# EAGLE board hs-64-spi - panel (EAGLE 9.5.1), part 1 of 4
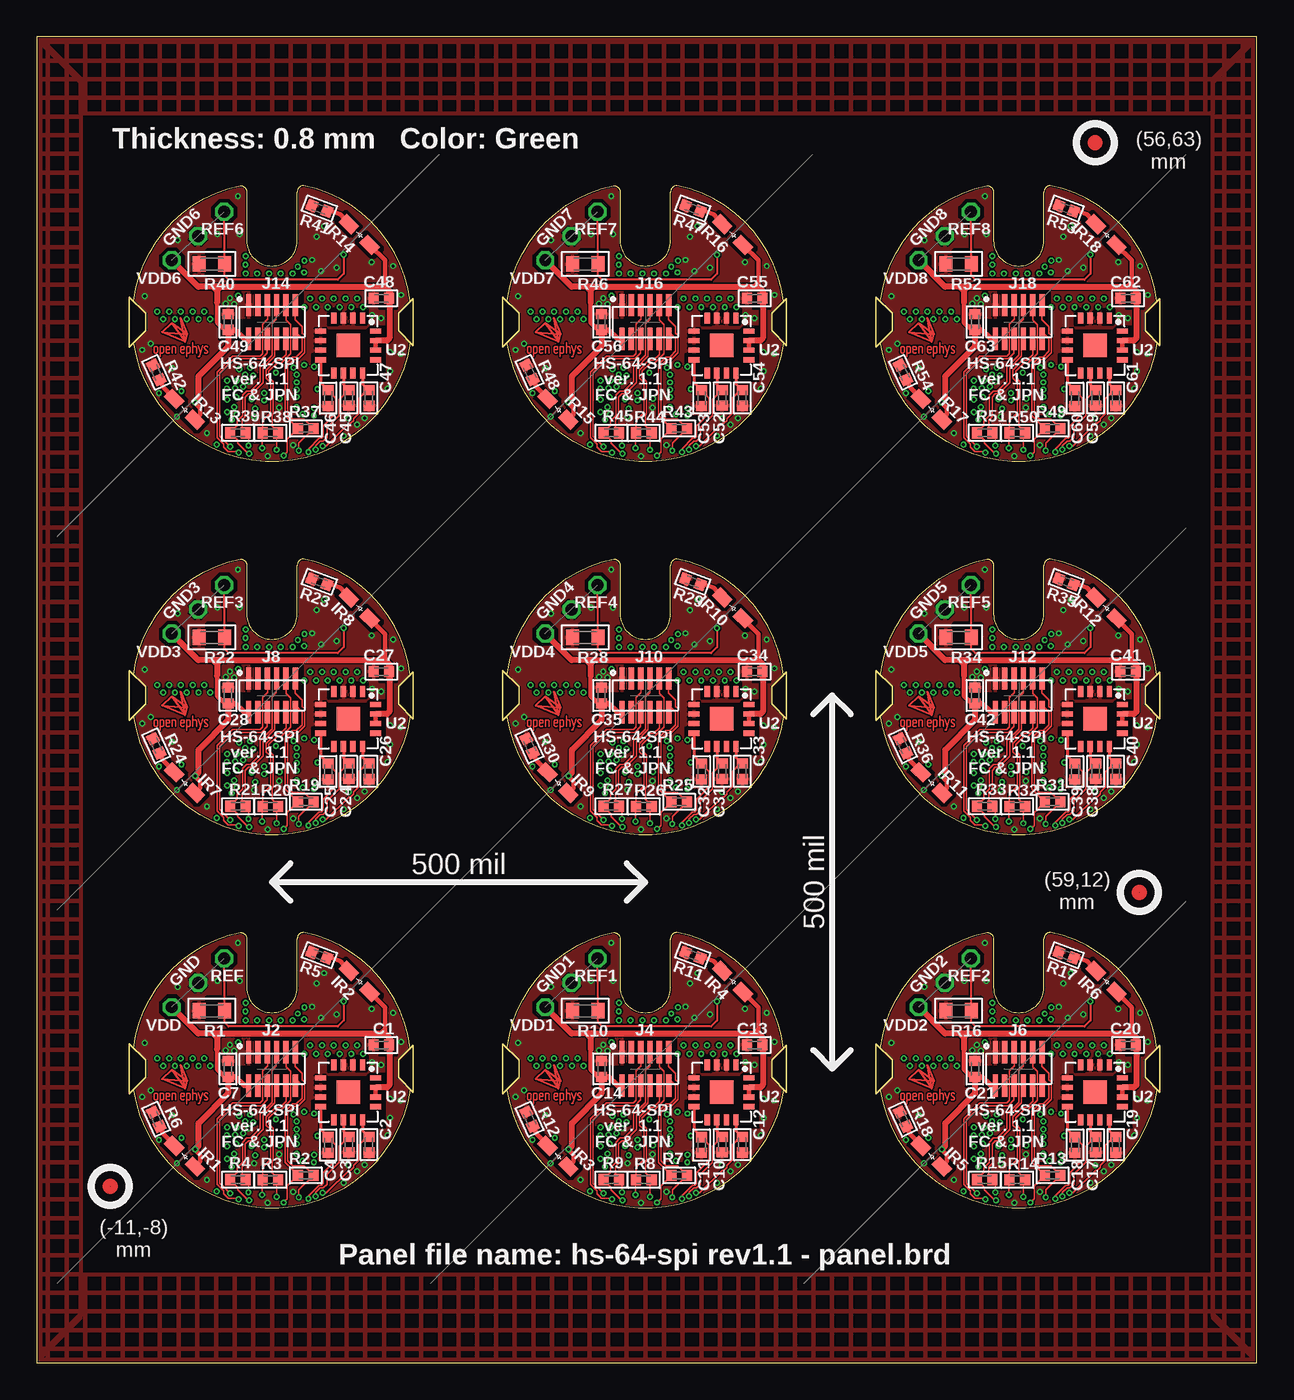
[diagram p0: board, top side]
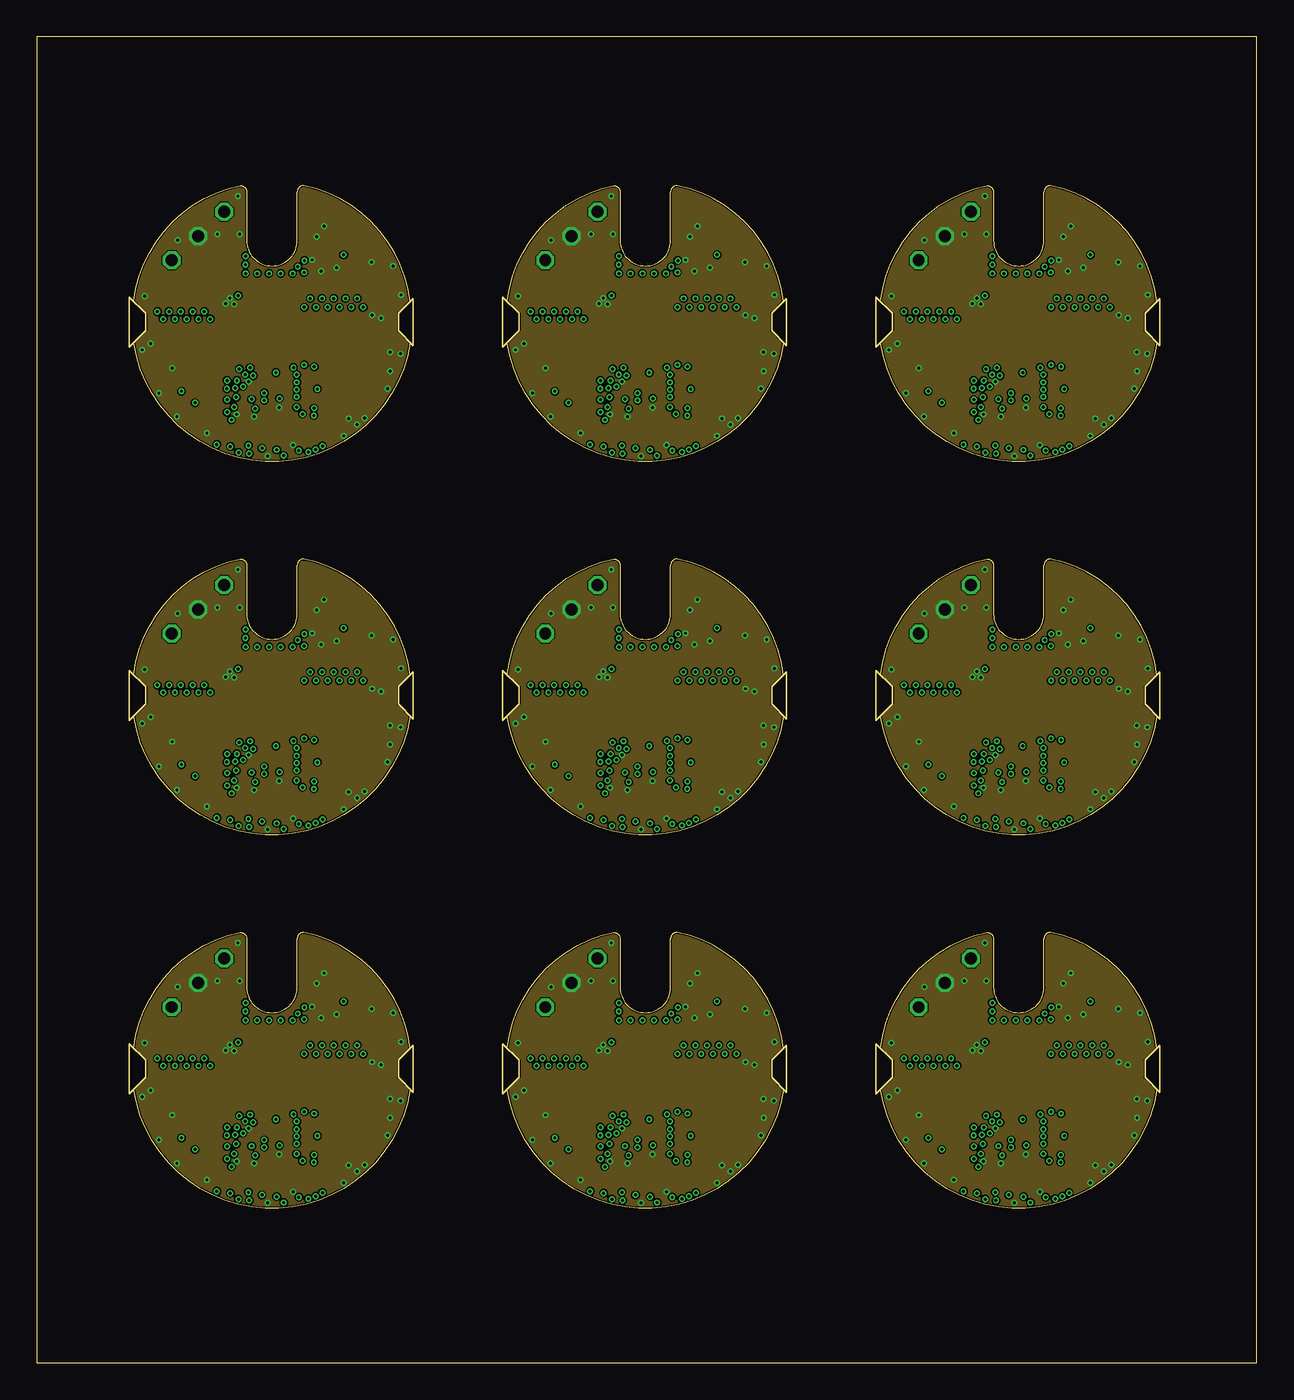
[diagram p1: board, inner layer PWR]
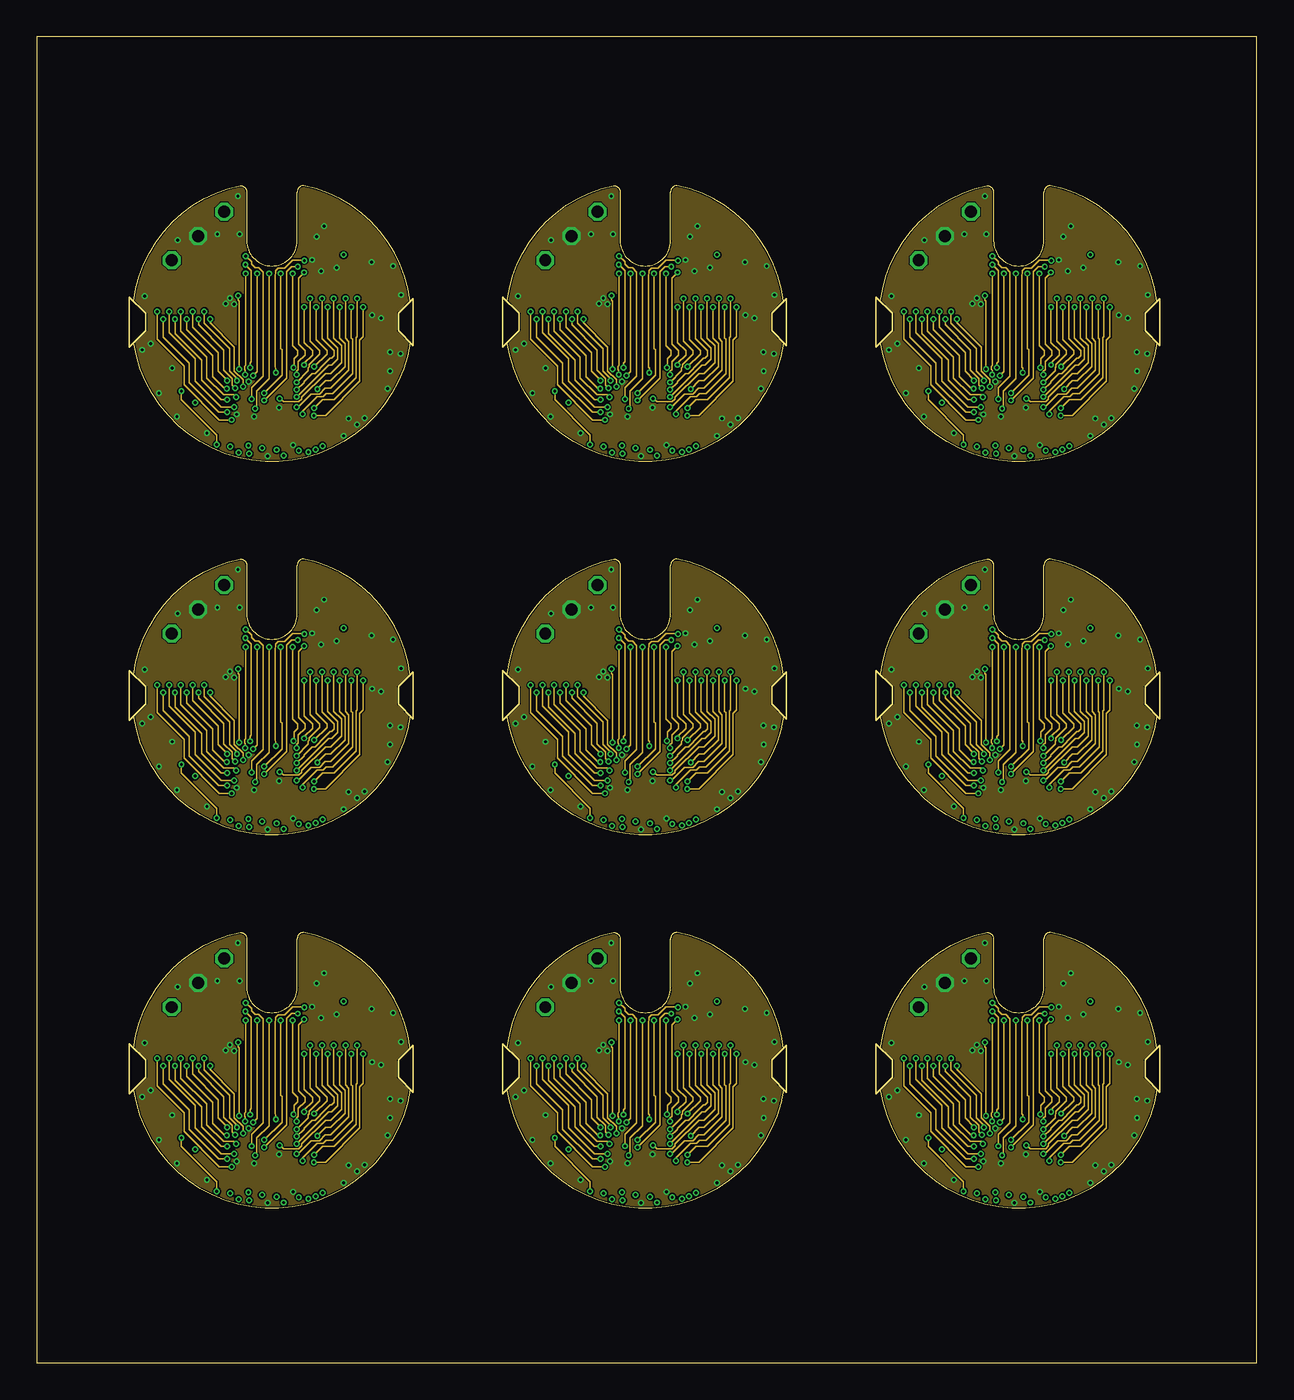
[diagram p2: board, inner layer GND]
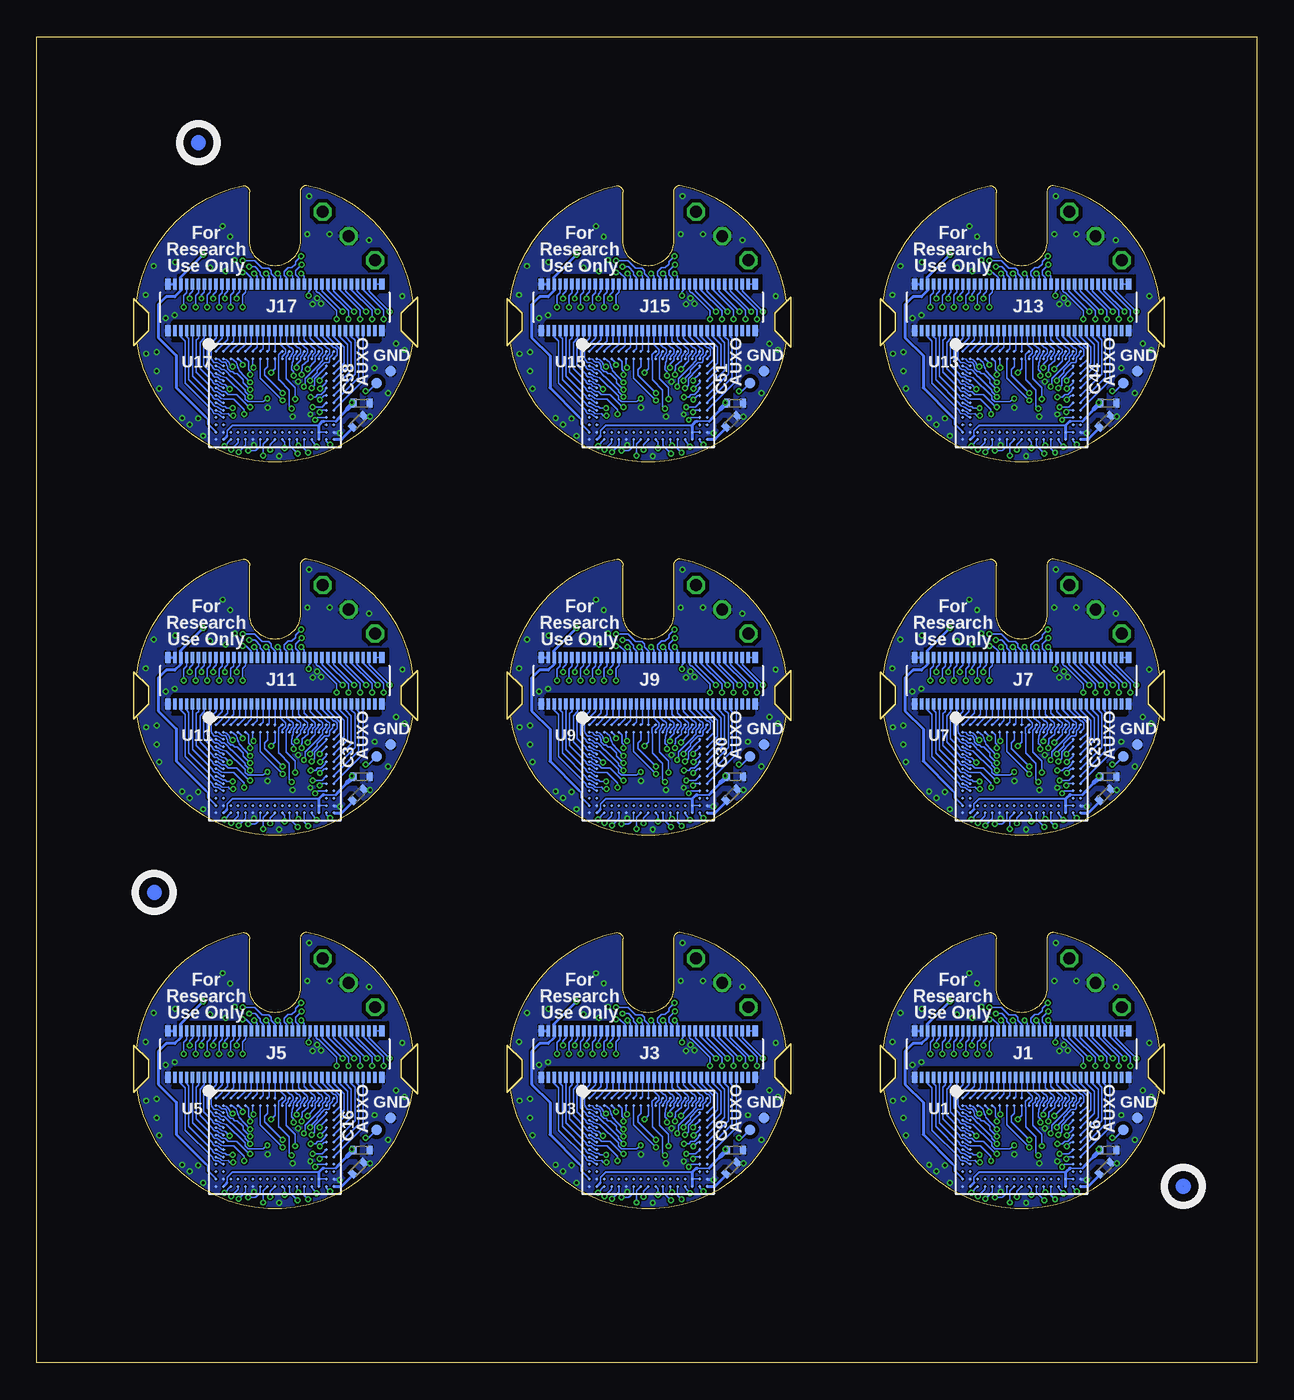
[diagram p3: board, bottom side, seen from below]

Size 83 x 90.2 mm. Coordinates in mm from the lower left corner, seen from the top.
Outline: 0,0 83,0 83,90.2 0,90.2 0,0
Outline: 6.6,21.4 7.4,20.6 7.4,19.4 6.6,18.6 arc163 25.4,18.6 24.6,19.4 24.6,20.6 25.4,21.4 arc72 18.16,29.27 arc90 17.71,28.83 17.71,25.52 arc-90 16,23.81 arc-90 14.29,25.52 14.29,28.83 arc90 13.84,29.27 arc72 6.6,21.4
Outline: 32,21.4 32.8,20.6 32.8,19.4 32,18.6 arc163 50.8,18.6 50,19.4 50,20.6 50.8,21.4 arc72 43.56,29.27 arc90 43.11,28.83 43.11,25.52 arc-90 41.4,23.81 arc-90 39.69,25.52 39.69,28.83 arc90 39.24,29.27 arc72 32,21.4
Outline: 57.4,21.4 58.2,20.6 58.2,19.4 57.4,18.6 arc163 76.2,18.6 75.4,19.4 75.4,20.6 76.2,21.4 arc72 68.96,29.27 arc90 68.51,28.83 68.51,25.52 arc-90 66.8,23.81 arc-90 65.09,25.52 65.09,28.83 arc90 64.64,29.27 arc72 57.4,21.4
Outline: 6.6,46.8 7.4,46 7.4,44.8 6.6,44 arc163 25.4,44 24.6,44.8 24.6,46 25.4,46.8 arc72 18.16,54.67 arc90 17.71,54.23 17.71,50.92 arc-90 16,49.21 arc-90 14.29,50.92 14.29,54.23 arc90 13.84,54.67 arc72 6.6,46.8
Outline: 32,46.8 32.8,46 32.8,44.8 32,44 arc163 50.8,44 50,44.8 50,46 50.8,46.8 arc72 43.56,54.67 arc90 43.11,54.23 43.11,50.92 arc-90 41.4,49.21 arc-90 39.69,50.92 39.69,54.23 arc90 39.24,54.67 arc72 32,46.8
Outline: 57.4,46.8 58.2,46 58.2,44.8 57.4,44 arc163 76.2,44 75.4,44.8 75.4,46 76.2,46.8 arc72 68.96,54.67 arc90 68.51,54.23 68.51,50.92 arc-90 66.8,49.21 arc-90 65.09,50.92 65.09,54.23 arc90 64.64,54.67 arc72 57.4,46.8
Outline: 6.6,72.2 7.4,71.4 7.4,70.2 6.6,69.4 arc163 25.4,69.4 24.6,70.2 24.6,71.4 25.4,72.2 arc72 18.16,80.07 arc90 17.71,79.63 17.71,76.33 arc-90 16,74.61 arc-90 14.29,76.33 14.29,79.63 arc90 13.84,80.07 arc72 6.6,72.2
Outline: 32,72.2 32.8,71.4 32.8,70.2 32,69.4 arc163 50.8,69.4 50,70.2 50,71.4 50.8,72.2 arc72 43.56,80.07 arc90 43.11,79.63 43.11,76.33 arc-90 41.4,74.61 arc-90 39.69,76.33 39.69,79.63 arc90 39.24,80.07 arc72 32,72.2
Outline: 57.4,72.2 58.2,71.4 58.2,70.2 57.4,69.4 arc163 76.2,69.4 75.4,70.2 75.4,71.4 76.2,72.2 arc72 68.96,80.07 arc90 68.51,79.63 68.51,76.33 arc-90 66.8,74.61 arc-90 65.09,76.33 65.09,79.63 arc90 64.64,80.07 arc72 57.4,72.2
Copper layers (1*2+3*16): Top 0.035mm / dielectric 0.2mm / PWR 0.0175mm / dielectric 0.3mm / GND 0.035mm / dielectric 0.2mm / Bottom 0.035mm
Design rules "seeed-studio-4-layer *": minimum track width 0.09mm, minimum drill 0.2mm, track to track 0.09mm, track to pad 0.09mm, pad to pad 0.09mm, via to via 0.09mm, smd to smd 0mil, copper to edge 0.1mm, drill to drill 10mil, minimum pad ring 6mil, minimum via ring 4mil, stop-mask expansion 1mil, vias tented up to drill 100mil, thermal gap 0.1mm
Net classes: 1 thick: width 0.102 mm; 2 diff: width 0.076 mm, drill 0.1 mm, clearance 0.051 mm
tKeepout: area 6.5,17.1 to 8,22.9; area 6.5,17.1 to 8,22.9; area 24,17.1 to 25.5,22.9; area 24,17.1 to 25.5,22.9; area 31.9,17.1 to 33.4,22.9; area 31.9,17.1 to 33.4,22.9; area 49.4,17.1 to 50.9,22.9; area 49.4,17.1 to 50.9,22.9; area 57.3,17.1 to 58.8,22.9; area 57.3,17.1 to 58.8,22.9; area 74.8,17.1 to 76.3,22.9; area 74.8,17.1 to 76.3,22.9; area 6.5,42.5 to 8,48.3; area 6.5,42.5 to 8,48.3; area 24,42.5 to 25.5,48.3; area 24,42.5 to 25.5,48.3; area 31.9,42.5 to 33.4,48.3; area 31.9,42.5 to 33.4,48.3; area 49.4,42.5 to 50.9,48.3; area 49.4,42.5 to 50.9,48.3; area 57.3,42.5 to 58.8,48.3; area 57.3,42.5 to 58.8,48.3; area 74.8,42.5 to 76.3,48.3; area 74.8,42.5 to 76.3,48.3; area 6.5,67.9 to 8,73.7; area 6.5,67.9 to 8,73.7; area 24,67.9 to 25.5,73.7; area 24,67.9 to 25.5,73.7; area 31.9,67.9 to 33.4,73.7; area 31.9,67.9 to 33.4,73.7; area 49.4,67.9 to 50.9,73.7; area 49.4,67.9 to 50.9,73.7; area 57.3,67.9 to 58.8,73.7; area 57.3,67.9 to 58.8,73.7; area 74.8,67.9 to 76.3,73.7; area 74.8,67.9 to 76.3,73.7
tRestrict: 1233 lines
bRestrict: area 8.5,15.3 to 9.6,16.4; area 33.9,15.3 to 35,16.4; area 59.3,15.3 to 60.4,16.4; area 8.5,40.7 to 9.6,41.8; area 33.9,40.7 to 35,41.8; area 59.3,40.7 to 60.4,41.8; area 8.5,66.1 to 9.6,67.2; area 33.9,66.1 to 35,67.2; area 59.3,66.1 to 60.4,67.2; 369 lines
Milling: 72 lines

## Footprints (pad centres in the part's own frame; a part is rotated, then mirrored left to right if it is on the bottom)
0402 = smd 0.686 x 0.762: 1 -0.533,0; 2 0.533,0
0402T = smd 0.4 x 0.6: 1 -0.533,0; 2 0.533,0
TESTPOINT_SMALL = drill 0.813 octagon: 1 0,0
LED_HAND = smd 1.2 x 0.8: A -1,0; K 1,0
DF40-70HEAD-LESS-SILK = smd 0.23 x 0.75: 1 -6.8,-1.585; 2 -6.4,-1.585; 3 -6,-1.585; 4 -5.6,-1.585; 5 -5.2,-1.585; 6 -4.8,-1.585; 7 -4.4,-1.585; 8 -4,-1.585; 9 -3.6,-1.585; 10 -3.2,-1.585; 11 -2.8,-1.585; 12 -2.4,-1.585; 13 -2,-1.585; 14 -1.6,-1.585; 15 -1.2,-1.585; 16 -0.8,-1.585; 17 -0.4,-1.585; 18 0,-1.585; 19 0.4,-1.585; 20 0.8,-1.585; 21 1.2,-1.585; 22 1.6,-1.585; 23 2,-1.585; 24 2.4,-1.585; 25 2.8,-1.585; 26 3.2,-1.585; 27 3.6,-1.585; 28 4,-1.585; 29 4.4,-1.585; 30 4.8,-1.585; 31 5.2,-1.585; 32 5.6,-1.585; 33 6,-1.585; 34 6.4,-1.585; 35 6.8,-1.585; 36 6.8,1.585; 37 6.4,1.585; 38 6,1.585; 39 5.6,1.585; 40 5.2,1.585; 41 4.8,1.585; 42 4.4,1.585; 43 4,1.585; 44 3.6,1.585; 45 3.2,1.585; 46 2.8,1.585; 47 2.4,1.585; 48 2,1.585; 49 1.6,1.585; 50 1.2,1.585; 51 0.8,1.585; 52 0.4,1.585; 53 0,1.585; 54 -0.4,1.585; 55 -0.8,1.585; 56 -1.2,1.585; 57 -1.6,1.585; 58 -2,1.585; 59 -2.4,1.585; 60 -2.8,1.585; 61 -3.2,1.585; 62 -3.6,1.585; 63 -4,1.585; 64 -4.4,1.585; 65 -4.8,1.585; 66 -5.2,1.585; 67 -5.6,1.585; 68 -6,1.585; 69 -6.4,1.585; 70 -6.8,1.585 | smd 0.35 x 0.75: M1 -7.275,-1.585; M2 7.275,-1.585; M3 7.275,1.585; M4 -7.275,1.585
A79622-001 = smd 0.36 x 1.524: 1 -1.587,1.143; 2 -1.587,-1.143; 3 -0.953,1.143; 4 -0.953,-1.143; 5 -0.318,1.143; 6 -0.318,-1.143; 7 0.318,1.143; 8 0.318,-1.143; 9 0.953,1.143; 10 0.953,-1.143; 11 1.587,1.143; 12 1.587,-1.143
0603 = smd 0.889 x 1.067: 1 -0.864,0; 2 0.864,0
TP07R = smd 0.7 x 0.7: TP 0,0
BGA104_0.5MM = smd 0.2 x 0.2: A1 -4,3; A2 -3.5,3; A3 -3,3; A4 -2.5,3; A5 -2,3; A6 -1.5,3; A7 -1,3; A8 -0.5,3; A9 0,3; A10 0.5,3; A11 1,3; A12 1.5,3; A13 2,3; A14 2.5,3; A15 3,3; A16 3.5,3; A17 4,3; B1 -4,2.5; B2 -3.5,2.5; B3 -3,2.5; B4 -2.5,2.5; B5 -2,2.5; B6 -1.5,2.5; B7 -1,2.5; B8 -0.5,2.5; B9 0,2.5; B10 0.5,2.5; B11 1,2.5; B12 1.5,2.5; B13 2,2.5; B14 2.5,2.5; B15 3,2.5; B16 3.5,2.5; B17 4,2.5; C1 -4,2; C2 -3.5,2; C16 3.5,2; C17 4,2; D1 -4,1.5; D2 -3.5,1.5; D16 3.5,1.5; D17 4,1.5; E1 -4,1; E2 -3.5,1; E16 3.5,1; E17 4,1; F1 -4,0.5; F2 -3.5,0.5; F16 3.5,0.5; F17 4,0.5; G1 -4,0; G2 -3.5,0; G16 3.5,0; G17 4,0; H1 -4,-0.5; H2 -3.5,-0.5; H16 3.5,-0.5; H17 4,-0.5; J1 -4,-1; J2 -3.5,-1; J16 3.5,-1; J17 4,-1; K1 -4,-1.5; K2 -3.5,-1.5; K16 3.5,-1.5; K17 4,-1.5; L1 -4,-2; L2 -3.5,-2; L16 3.5,-2; L17 4,-2; M1 -4,-2.5; M2 -3.5,-2.5; M3 -3,-2.5; M4 -2.5,-2.5; M5 -2,-2.5; M6 -1.5,-2.5; M7 -1,-2.5; M8 -0.5,-2.5; M9 0,-2.5; M10 0.5,-2.5; M11 1,-2.5; M12 1.5,-2.5; M13 2,-2.5; M14 2.5,-2.5; M15 3,-2.5; M16 3.5,-2.5; M17 4,-2.5; N1 -4,-3; N2 -3.5,-3; N3 -3,-3; N4 -2.5,-3; N5 -2,-3; N6 -1.5,-3; N7 -1,-3; N8 -0.5,-3; N9 0,-3; N10 0.5,-3; N11 1,-3; N12 1.5,-3; N13 2,-3; N14 2.5,-3; N15 3,-3; N16 3.5,-3; N17 4,-3
ADXL335_IDAX = smd 0.75 x 0.35: 1 -1.875,0.975; 2 -1.875,0.325; 3 -1.875,-0.325; 4 -1.875,-0.975; 9 1.875,-0.975; 10 1.875,-0.325; 11 1.875,0.325; 12 1.875,0.975 | smd 0.35 x 0.75: 5 -0.975,-1.875; 6 -0.325,-1.875; 7 0.325,-1.875; 8 0.975,-1.875; 13 0.975,1.875; 14 0.325,1.875; 15 -0.325,1.875; 16 -0.975,1.875 | smd 1.6 x 1.6: CENTER 0,0

## Placement (x,y rotation side)
C1  0.1uF  [0402]  23.44,21.61 180 top
C2  27n  [0402]  22.6,14.83 270 top
C3  27n  [0402]  21.23,14.84 270 top
C4  27n  [0402]  19.82,14.82 270 top
C5  10nF  [0402T]  10.33,13.23 45 bottom
C6  0.1uF  [0402T]  10.1,14.47 180 bottom
C7  1u  [0402]  13.02,19.99 90 top
C8  10nF  [0402T]  35.73,13.23 45 bottom
C9  0.1uF  [0402T]  35.5,14.47 180 bottom
C10  27n  [0402]  46.63,14.84 270 top
C11  27n  [0402]  45.22,14.82 270 top
C12  27n  [0402]  48,14.83 270 top
C13  0.1uF  [0402]  48.84,21.61 180 top
C14  1u  [0402]  38.42,19.99 90 top
C15  10nF  [0402T]  61.13,13.23 45 bottom
C16  0.1uF  [0402T]  60.9,14.47 180 bottom
C17  27n  [0402]  72.03,14.84 270 top
C18  27n  [0402]  70.62,14.82 270 top
C19  27n  [0402]  73.4,14.83 270 top
C20  0.1uF  [0402]  74.24,21.61 180 top
C21  1u  [0402]  63.82,19.99 90 top
C22  10nF  [0402T]  10.33,38.63 45 bottom
C23  0.1uF  [0402T]  10.1,39.87 180 bottom
C24  27n  [0402]  21.23,40.24 270 top
C25  27n  [0402]  19.82,40.22 270 top
C26  27n  [0402]  22.6,40.23 270 top
C27  0.1uF  [0402]  23.44,47.01 180 top
C28  1u  [0402]  13.02,45.39 90 top
C29  10nF  [0402T]  35.73,38.63 45 bottom
C30  0.1uF  [0402T]  35.5,39.87 180 bottom
C31  27n  [0402]  46.63,40.24 270 top
C32  27n  [0402]  45.22,40.22 270 top
C33  27n  [0402]  48,40.23 270 top
C34  0.1uF  [0402]  48.84,47.01 180 top
C35  1u  [0402]  38.42,45.39 90 top
C36  10nF  [0402T]  61.13,38.63 45 bottom
C37  0.1uF  [0402T]  60.9,39.87 180 bottom
C38  27n  [0402]  72.03,40.24 270 top
C39  27n  [0402]  70.62,40.22 270 top
C40  27n  [0402]  73.4,40.23 270 top
C41  0.1uF  [0402]  74.24,47.01 180 top
C42  1u  [0402]  63.82,45.39 90 top
C43  10nF  [0402T]  10.33,64.03 45 bottom
C44  0.1uF  [0402T]  10.1,65.27 180 bottom
C45  27n  [0402]  21.23,65.64 270 top
C46  27n  [0402]  19.82,65.62 270 top
C47  27n  [0402]  22.6,65.63 270 top
C48  0.1uF  [0402]  23.44,72.41 180 top
C49  1u  [0402]  13.02,70.79 90 top
C50  10nF  [0402T]  35.73,64.03 45 bottom
C51  0.1uF  [0402T]  35.5,65.27 180 bottom
C52  27n  [0402]  46.63,65.64 270 top
C53  27n  [0402]  45.22,65.62 270 top
C54  27n  [0402]  48,65.63 270 top
C55  0.1uF  [0402]  48.84,72.41 180 top
C56  1u  [0402]  38.42,70.79 90 top
C57  10nF  [0402T]  61.13,64.03 45 bottom
C58  0.1uF  [0402T]  60.9,65.27 180 bottom
C59  27n  [0402]  72.03,65.64 270 top
C60  27n  [0402]  70.62,65.62 270 top
C61  27n  [0402]  73.4,65.63 270 top
C62  0.1uF  [0402]  74.24,72.41 180 top
C63  1u  [0402]  63.82,70.79 90 top
E$1  [FIDUCIAL]  5,12 0 top
E$2  [FIDUCIAL]  75,32 0 top
E$3  [FIDUCIAL]  72,83 0 top
E$4  [FIDUCIAL]  5,12 0 bottom
E$5  [FIDUCIAL]  75,32 0 bottom
E$6  [FIDUCIAL]  72,83 0 bottom
GND  TESTPOINT_SMALL  [TESTPOINT_SMALL]  10.97,25.84 0 top
GND1  TESTPOINT_SMALL  [TESTPOINT_SMALL]  36.37,25.84 0 top
GND2  TESTPOINT_SMALL  [TESTPOINT_SMALL]  61.77,25.84 0 top
GND3  TESTPOINT_SMALL  [TESTPOINT_SMALL]  10.97,51.24 0 top
GND4  TESTPOINT_SMALL  [TESTPOINT_SMALL]  36.37,51.24 0 top
GND5  TESTPOINT_SMALL  [TESTPOINT_SMALL]  61.77,51.24 0 top
GND6  TESTPOINT_SMALL  [TESTPOINT_SMALL]  10.97,76.64 0 top
GND7  TESTPOINT_SMALL  [TESTPOINT_SMALL]  36.37,76.64 0 top
GND8  TESTPOINT_SMALL  [TESTPOINT_SMALL]  61.77,76.64 0 top
IR1  [LED_HAND]  10.06,14.06 135 top
IR2  [LED_HAND]  21.94,25.94 135 top
IR3  [LED_HAND]  35.46,14.06 135 top
IR4  [LED_HAND]  47.34,25.94 135 top
IR5  [LED_HAND]  60.86,14.06 135 top
IR6  [LED_HAND]  72.74,25.94 135 top
IR7  [LED_HAND]  10.06,39.46 135 top
IR8  [LED_HAND]  21.94,51.34 135 top
IR9  [LED_HAND]  35.46,39.46 135 top
IR10  [LED_HAND]  47.34,51.34 135 top
IR11  [LED_HAND]  60.86,39.46 135 top
IR12  [LED_HAND]  72.74,51.34 135 top
IR13  [LED_HAND]  10.06,64.86 135 top
IR14  [LED_HAND]  21.94,76.74 135 top
IR15  [LED_HAND]  35.46,64.86 135 top
IR16  [LED_HAND]  47.34,76.74 135 top
IR17  [LED_HAND]  60.86,64.86 135 top
IR18  [LED_HAND]  72.74,76.74 135 top
J1  DF40C-70DP-0.4V(51)  [DF40-70HEAD-LESS-SILK]  16,21 0 bottom
J2  A79622-001  [A79622-001]  16,20 0 top
J3  DF40C-70DP-0.4V(51)  [DF40-70HEAD-LESS-SILK]  41.4,21 0 bottom
J4  A79622-001  [A79622-001]  41.4,20 0 top
J5  DF40C-70DP-0.4V(51)  [DF40-70HEAD-LESS-SILK]  66.8,21 0 bottom
J6  A79622-001  [A79622-001]  66.8,20 0 top
J7  DF40C-70DP-0.4V(51)  [DF40-70HEAD-LESS-SILK]  16,46.4 0 bottom
J8  A79622-001  [A79622-001]  16,45.4 0 top
J9  DF40C-70DP-0.4V(51)  [DF40-70HEAD-LESS-SILK]  41.4,46.4 0 bottom
J10  A79622-001  [A79622-001]  41.4,45.4 0 top
J11  DF40C-70DP-0.4V(51)  [DF40-70HEAD-LESS-SILK]  66.8,46.4 0 bottom
J12  A79622-001  [A79622-001]  66.8,45.4 0 top
J13  DF40C-70DP-0.4V(51)  [DF40-70HEAD-LESS-SILK]  16,71.8 0 bottom
J14  A79622-001  [A79622-001]  16,70.8 0 top
J15  DF40C-70DP-0.4V(51)  [DF40-70HEAD-LESS-SILK]  41.4,71.8 0 bottom
J16  A79622-001  [A79622-001]  41.4,70.8 0 top
J17  DF40C-70DP-0.4V(51)  [DF40-70HEAD-LESS-SILK]  66.8,71.8 0 bottom
J18  A79622-001  [A79622-001]  66.8,70.8 0 top
R1  DNP  [0603]  11.92,23.95 0 top
R2  100  [0402]  18.3,12.75 180 top
R3  100  [0402]  15.9,12.45 180 top
R4  100  [0402]  13.68,12.46 0 top
R5  820  [0402]  19.23,27.72 160 top
R6  820  [0402]  8.13,16.57 115 top
R7  100  [0402]  43.7,12.75 180 top
R8  100  [0402]  41.3,12.45 180 top
R9  100  [0402]  39.08,12.46 0 top
R10  DNP  [0603]  37.32,23.95 0 top
R11  820  [0402]  44.63,27.72 160 top
R12  820  [0402]  33.53,16.57 115 top
R13  100  [0402]  69.1,12.75 180 top
R14  100  [0402]  66.7,12.45 180 top
R15  100  [0402]  64.48,12.46 0 top
R16  DNP  [0603]  62.72,23.95 0 top
R17  820  [0402]  70.03,27.72 160 top
R18  820  [0402]  58.93,16.57 115 top
R19  100  [0402]  18.3,38.15 180 top
R20  100  [0402]  15.9,37.85 180 top
R21  100  [0402]  13.68,37.86 0 top
R22  DNP  [0603]  11.92,49.35 0 top
R23  820  [0402]  19.23,53.12 160 top
R24  820  [0402]  8.13,41.97 115 top
R25  100  [0402]  43.7,38.15 180 top
R26  100  [0402]  41.3,37.85 180 top
R27  100  [0402]  39.08,37.86 0 top
R28  DNP  [0603]  37.32,49.35 0 top
R29  820  [0402]  44.63,53.12 160 top
R30  820  [0402]  33.53,41.97 115 top
R31  100  [0402]  69.1,38.15 180 top
R32  100  [0402]  66.7,37.85 180 top
R33  100  [0402]  64.48,37.86 0 top
R34  DNP  [0603]  62.72,49.35 0 top
R35  820  [0402]  70.03,53.12 160 top
R36  820  [0402]  58.93,41.97 115 top
R37  100  [0402]  18.3,63.55 180 top
R38  100  [0402]  15.9,63.25 180 top
R39  100  [0402]  13.68,63.26 0 top
R40  DNP  [0603]  11.92,74.75 0 top
R41  820  [0402]  19.23,78.52 160 top
R42  820  [0402]  8.13,67.37 115 top
R43  100  [0402]  43.7,63.55 180 top
R44  100  [0402]  41.3,63.25 180 top
R45  100  [0402]  39.08,63.26 0 top
R46  DNP  [0603]  37.32,74.75 0 top
R47  820  [0402]  44.63,78.52 160 top
R48  820  [0402]  33.53,67.37 115 top
R49  100  [0402]  69.1,63.55 180 top
R50  100  [0402]  66.7,63.25 180 top
R51  100  [0402]  64.48,63.26 0 top
R52  DNP  [0603]  62.72,74.75 0 top
R53  820  [0402]  70.03,78.52 160 top
R54  820  [0402]  58.93,67.37 115 top
REF  TESTPOINT_SMALL  [TESTPOINT_SMALL]  12.75,27.49 0 top
REF1  TESTPOINT_SMALL  [TESTPOINT_SMALL]  38.15,27.49 0 top
REF2  TESTPOINT_SMALL  [TESTPOINT_SMALL]  63.55,27.49 0 top
REF3  TESTPOINT_SMALL  [TESTPOINT_SMALL]  12.75,52.89 0 top
REF4  TESTPOINT_SMALL  [TESTPOINT_SMALL]  38.15,52.89 0 top
REF5  TESTPOINT_SMALL  [TESTPOINT_SMALL]  63.55,52.89 0 top
REF6  TESTPOINT_SMALL  [TESTPOINT_SMALL]  12.75,78.29 0 top
REF7  TESTPOINT_SMALL  [TESTPOINT_SMALL]  38.15,78.29 0 top
REF8  TESTPOINT_SMALL  [TESTPOINT_SMALL]  63.55,78.29 0 top
TP1  VCC  [TP07R]  8.12,16.64 0 bottom
TP2  VCC  [TP07R]  9.08,15.83 0 bottom
TP3  VCC  [TP07R]  34.48,15.83 0 bottom
TP4  VCC  [TP07R]  33.52,16.64 0 bottom
TP5  VCC  [TP07R]  59.88,15.83 0 bottom
TP6  VCC  [TP07R]  58.92,16.64 0 bottom
TP7  VCC  [TP07R]  9.08,41.23 0 bottom
TP8  VCC  [TP07R]  8.12,42.04 0 bottom
TP9  VCC  [TP07R]  34.48,41.23 0 bottom
TP10  VCC  [TP07R]  33.52,42.04 0 bottom
TP11  VCC  [TP07R]  59.88,41.23 0 bottom
TP12  VCC  [TP07R]  58.92,42.04 0 bottom
TP13  VCC  [TP07R]  9.08,66.63 0 bottom
TP14  VCC  [TP07R]  8.12,67.44 0 bottom
TP15  VCC  [TP07R]  34.48,66.63 0 bottom
TP16  VCC  [TP07R]  33.52,67.44 0 bottom
TP17  VCC  [TP07R]  59.88,66.63 0 bottom
TP18  VCC  [TP07R]  58.92,67.44 0 bottom
U1  RHD2064_BGA  [BGA104_0.5MM]  16,15 0 bottom
U2  ADXL335_IDAX  [ADXL335_IDAX]  21.18,18.4 270 top
U3  RHD2064_BGA  [BGA104_0.5MM]  41.4,15 0 bottom
U4  ADXL335_IDAX  [ADXL335_IDAX]  46.58,18.4 270 top
U5  RHD2064_BGA  [BGA104_0.5MM]  66.8,15 0 bottom
U6  ADXL335_IDAX  [ADXL335_IDAX]  71.98,18.4 270 top
U7  RHD2064_BGA  [BGA104_0.5MM]  16,40.4 0 bottom
U8  ADXL335_IDAX  [ADXL335_IDAX]  21.18,43.8 270 top
U9  RHD2064_BGA  [BGA104_0.5MM]  41.4,40.4 0 bottom
U10  ADXL335_IDAX  [ADXL335_IDAX]  46.58,43.8 270 top
U11  RHD2064_BGA  [BGA104_0.5MM]  66.8,40.4 0 bottom
U12  ADXL335_IDAX  [ADXL335_IDAX]  71.98,43.8 270 top
U13  RHD2064_BGA  [BGA104_0.5MM]  16,65.8 0 bottom
U14  ADXL335_IDAX  [ADXL335_IDAX]  21.18,69.2 270 top
U15  RHD2064_BGA  [BGA104_0.5MM]  41.4,65.8 0 bottom
U16  ADXL335_IDAX  [ADXL335_IDAX]  46.58,69.2 270 top
U17  RHD2064_BGA  [BGA104_0.5MM]  66.8,65.8 0 bottom
U18  ADXL335_IDAX  [ADXL335_IDAX]  71.98,69.2 270 top
VDD  TESTPOINT_SMALL  [TESTPOINT_SMALL]  9.19,24.19 0 top
VDD1  TESTPOINT_SMALL  [TESTPOINT_SMALL]  34.59,24.19 0 top
VDD2  TESTPOINT_SMALL  [TESTPOINT_SMALL]  59.99,24.19 0 top
VDD3  TESTPOINT_SMALL  [TESTPOINT_SMALL]  9.19,49.59 0 top
VDD4  TESTPOINT_SMALL  [TESTPOINT_SMALL]  34.59,49.59 0 top
VDD5  TESTPOINT_SMALL  [TESTPOINT_SMALL]  59.99,49.59 0 top
VDD6  TESTPOINT_SMALL  [TESTPOINT_SMALL]  9.19,74.99 0 top
VDD7  TESTPOINT_SMALL  [TESTPOINT_SMALL]  34.59,74.99 0 top
VDD8  TESTPOINT_SMALL  [TESTPOINT_SMALL]  59.99,74.99 0 top
X  OE-LOGO_3.5X2.5  [OE-LOGO-3.5X2.5]  9.63,18.56 0 top
X1  OE-LOGO_3.5X2.5  [OE-LOGO-3.5X2.5]  35.03,18.56 0 top
X2  OE-LOGO_3.5X2.5  [OE-LOGO-3.5X2.5]  60.43,18.56 0 top
X3  OE-LOGO_3.5X2.5  [OE-LOGO-3.5X2.5]  9.63,43.96 0 top
X4  OE-LOGO_3.5X2.5  [OE-LOGO-3.5X2.5]  35.03,43.96 0 top
X5  OE-LOGO_3.5X2.5  [OE-LOGO-3.5X2.5]  60.43,43.96 0 top
X6  OE-LOGO_3.5X2.5  [OE-LOGO-3.5X2.5]  9.63,69.36 0 top
X7  OE-LOGO_3.5X2.5  [OE-LOGO-3.5X2.5]  35.03,69.36 0 top
X8  OE-LOGO_3.5X2.5  [OE-LOGO-3.5X2.5]  60.43,69.36 0 top

## Library data of the parts
C1-C4 C6 C7 C9-C14 C16-C21 C23-C28 C30-C35 C37-C42 C44-C49 C51-C56 C58-C63 J1 J3 J5 J7 J9 J11 J13 J15 J17 R2-R9 R11-R15 R17-R21 R23-R27 R29-R33 R35-R39 R41-R45 R47-R51 R53 R54 TP1-TP18 U1 U3 U5 U7 U9 U11 U13 U15 U17 X X1-X8 = jonnew
C5 C8 C15 C22 C29 C36 C43 C50 C57 = jonnew; PARTNO: GRM033R71E103KE14D
E$1-E$6 = fiducial
GND GND1-GND8 REF REF1-REF8 VDD VDD1-VDD8 = RHD2000_eval_board
IR1-IR18 = CNP-miscellaneous
J2 J4 J6 J8 J10 J12 J14 J16 J18 U2 U4 U6 U8 U10 U12 U14 U16 U18 = hs-64-spi
R1 R10 R16 R22 R28 R34 R40 R46 R52 = jonnew; DK: PxxxxHTR-ND; MN: Panasonic; MPN: ERJ-3EKFxxxxV

## Nets
+3V3_AN: C1.1 C6.2 C7.1 IR1.A IR2.A J2.2 U1.M15 U1.M16 U1.N2 U1.N15 U2.14 U2.15 VDD.1
+3V3_AN1: C9.2 C13.1 C14.1 IR3.A IR4.A J4.2 U3.M15 U3.M16 U3.N2 U3.N15 U4.14 U4.15 VDD1.1
+3V3_AN2: C16.2 C20.1 C21.1 IR5.A IR6.A J6.2 U5.M15 U5.M16 U5.N2 U5.N15 U6.14 U6.15 VDD2.1
+3V3_AN3: C23.2 C27.1 C28.1 IR7.A IR8.A J8.2 U7.M15 U7.M16 U7.N2 U7.N15 U8.14 U8.15 VDD3.1
+3V3_AN4: C30.2 C34.1 C35.1 IR9.A IR10.A J10.2 U9.M15 U9.M16 U9.N2 U9.N15 U10.14 U10.15 VDD4.1
+3V3_AN5: C37.2 C41.1 C42.1 IR11.A IR12.A J12.2 U11.M15 U11.M16 U11.N2 U11.N15 U12.14 U12.15 VDD5.1
+3V3_AN6: C44.2 C48.1 C49.1 IR13.A IR14.A J14.2 U13.M15 U13.M16 U13.N2 U13.N15 U14.14 U14.15 VDD6.1
+3V3_AN7: C51.2 C55.1 C56.1 IR15.A IR16.A J16.2 U15.M15 U15.M16 U15.N2 U15.N15 U16.14 U16.15 VDD7.1
+3V3_AN8: C58.2 C62.1 C63.1 IR17.A IR18.A J18.2 U17.M15 U17.M16 U17.N2 U17.N15 U18.14 U18.15 VDD8.1
AGND6: C1.2 C2.2 C3.2 C4.2 C5.2 C6.1 C7.2 GND.1 J1.70 J1.M1 J1.M2 J1.M4 J2.1 R1.1 R5.2 R6.2 TP1.TP U1.M2 U1.M17 U1.N1 U1.N6 U2.2 U2.3 U2.5 U2.6 U2.7
AGND7: C8.2 C9.1 C10.2 C11.2 C12.2 C13.2 C14.2 GND1.1 J3.70 J3.M1 J3.M2 J3.M4 J4.1 R10.1 R11.2 R12.2 TP4.TP U3.M2 U3.M17 U3.N1 U3.N6 U4.2 U4.3 U4.5 U4.6 U4.7
AGND8: C15.2 C16.1 C17.2 C18.2 C19.2 C20.2 C21.2 GND2.1 J5.70 J5.M1 J5.M2 J5.M4 J6.1 R16.1 R17.2 R18.2 TP6.TP U5.M2 U5.M17 U5.N1 U5.N6 U6.2 U6.3 U6.5 U6.6 U6.7
AGND9: C22.2 C23.1 C24.2 C25.2 C26.2 C27.2 C28.2 GND3.1 J7.70 J7.M1 J7.M2 J7.M4 J8.1 R22.1 R23.2 R24.2 TP8.TP U7.M2 U7.M17 U7.N1 U7.N6 U8.2 U8.3 U8.5 U8.6 U8.7
AGND10: C29.2 C30.1 C31.2 C32.2 C33.2 C34.2 C35.2 GND4.1 J9.70 J9.M1 J9.M2 J9.M4 J10.1 R28.1 R29.2 R30.2 TP10.TP U9.M2 U9.M17 U9.N1 U9.N6 U10.2 U10.3 U10.5 U10.6 U10.7
AGND11: C36.2 C37.1 C38.2 C39.2 C40.2 C41.2 C42.2 GND5.1 J11.70 J11.M1 J11.M2 J11.M4 J12.1 R34.1 R35.2 R36.2 TP12.TP U11.M2 U11.M17 U11.N1 U11.N6 U12.2 U12.3 U12.5 U12.6 U12.7
AGND12: C43.2 C44.1 C45.2 C46.2 C47.2 C48.2 C49.2 GND6.1 J13.70 J13.M1 J13.M2 J13.M4 J14.1 R40.1 R41.2 R42.2 TP14.TP U13.M2 U13.M17 U13.N1 U13.N6 U14.2 U14.3 U14.5 U14.6 U14.7
AGND13: C50.2 C51.1 C52.2 C53.2 C54.2 C55.2 C56.2 GND7.1 J15.70 J15.M1 J15.M2 J15.M4 J16.1 R46.1 R47.2 R48.2 TP16.TP U15.M2 U15.M17 U15.N1 U15.N6 U16.2 U16.3 U16.5 U16.6 U16.7
AGND14: C57.2 C58.1 C59.2 C60.2 C61.2 C62.2 C63.2 GND8.1 J17.70 J17.M1 J17.M2 J17.M4 J18.1 R52.1 R53.2 R54.2 TP18.TP U17.M2 U17.M17 U17.N1 U17.N6 U18.2 U18.3 U18.5 U18.6 U18.7
E0: J1.2 U1.K2
E1: J1.68 U1.J1
E2: J1.3 U1.J2
E3: J1.67 U1.H1
E4: J1.4 U1.H2
E5: J1.66 U1.G1
E6: J1.5 U1.G2
E7: J1.65 U1.F1
E8: J1.6 U1.F2
E9: J1.64 U1.E1
E10: J1.7 U1.E2
E11: J1.63 U1.D1
E12: J1.8 U1.D2
E13: J1.62 U1.C1
E14: J1.9 U1.C2
E15: J1.61 U1.B1
E16: J1.10 U1.A1
E17: J1.60 U1.B2
E18: J1.11 U1.A2
E19: J1.59 U1.B3
E20: J1.12 U1.A3
E21: J1.58 U1.B4
E22: J1.13 U1.A4
E23: J1.57 U1.B5
E24: J1.14 U1.A5
E25: J1.56 U1.B6
E26: J1.15 U1.A6
E27: J1.55 U1.B7
E28: J1.16 U1.A7
E29: J1.54 U1.B8
E30: J1.17 U1.A8
E31: J1.53 U1.B9
E32: J1.18 U1.A9
E33: J1.52 U1.A10
E34: J1.19 U1.B10
E35: J1.51 U1.A11
E36: J1.20 U1.B11
E37: J1.50 U1.A12
E38: J1.21 U1.B12
E39: J1.49 U1.A13
E40: J1.22 U1.B13
E41: J1.48 U1.A14
E42: J1.23 U1.B14
E43: J1.47 U1.A15
E44: J1.24 U1.B15
E45: J1.46 U1.A16
E46: J1.25 U1.B16
E47: J1.45 U1.A17
E48: J1.26 U1.B17
E49: J1.44 U1.C16
E50: J1.27 U1.C17
E51: J1.43 U1.D16
E52: J1.28 U1.D17
E53: J1.42 U1.E16
E54: J1.29 U1.E17
E55: J1.41 U1.F16
E56: J1.30 U1.F17
E57: J1.40 U1.G16
E58: J1.31 U1.G17
E59: J1.39 U1.H16
E60: J1.32 U1.H17
E61: J1.38 U1.J16
E62: J1.33 U1.J17
E63: J1.37 U1.K16
E64: J3.17 U3.A8
E65: J3.54 U3.B8
E66: J3.16 U3.A7
E67: J3.55 U3.B7
E68: J3.15 U3.A6
E69: J3.56 U3.B6
E70: J3.14 U3.A5
E71: J3.57 U3.B5
E72: J3.13 U3.A4
E73: J3.58 U3.B4
E74: J3.12 U3.A3
E75: J3.59 U3.B3
E76: J3.11 U3.A2
E77: J3.60 U3.B2
E78: J3.10 U3.A1
E79: J3.61 U3.B1
E80: J3.9 U3.C2
E81: J3.62 U3.C1
E82: J3.8 U3.D2
E83: J3.63 U3.D1
E84: J3.7 U3.E2
E85: J3.64 U3.E1
E86: J3.6 U3.F2
E87: J3.65 U3.F1
E88: J3.5 U3.G2
E89: J3.66 U3.G1
E90: J3.4 U3.H2
E91: J3.67 U3.H1
E92: J3.3 U3.J2
E93: J3.68 U3.J1
E94: J3.2 U3.K2
E95: J3.53 U3.B9
E96: J3.52 U3.A10
E97: J3.19 U3.B10
E98: J3.51 U3.A11
E99: J3.20 U3.B11
E100: J3.50 U3.A12
E101: J3.21 U3.B12
E102: J3.49 U3.A13
E103: J3.22 U3.B13
E104: J3.48 U3.A14
E105: J3.23 U3.B14
E106: J3.47 U3.A15
E107: J3.24 U3.B15
E108: J3.46 U3.A16
E109: J3.25 U3.B16
E110: J3.45 U3.A17
E111: J3.26 U3.B17
E112: J3.44 U3.C16
E113: J3.27 U3.C17
E114: J3.43 U3.D16
E115: J3.28 U3.D17
E116: J3.42 U3.E16
E117: J3.29 U3.E17
E118: J3.41 U3.F16
E119: J3.30 U3.F17
E120: J3.40 U3.G16
E121: J3.31 U3.G17
E122: J3.39 U3.H16
E123: J3.32 U3.H17
E124: J3.38 U3.J16
E125: J3.33 U3.J17
E126: J3.37 U3.K16
E127: J3.18 U3.A9
E128: J5.17 U5.A8
E129: J5.54 U5.B8
E130: J5.16 U5.A7
E131: J5.55 U5.B7
E132: J5.15 U5.A6
E133: J5.56 U5.B6
E134: J5.14 U5.A5
E135: J5.57 U5.B5
E136: J5.13 U5.A4
E137: J5.58 U5.B4
E138: J5.12 U5.A3
E139: J5.59 U5.B3
E140: J5.11 U5.A2
E141: J5.60 U5.B2
E142: J5.10 U5.A1
E143: J5.61 U5.B1
E144: J5.9 U5.C2
E145: J5.62 U5.C1
E146: J5.8 U5.D2
E147: J5.63 U5.D1
E148: J5.7 U5.E2
E149: J5.64 U5.E1
E150: J5.6 U5.F2
E151: J5.65 U5.F1
E152: J5.5 U5.G2
E153: J5.66 U5.G1
E154: J5.4 U5.H2
E155: J5.67 U5.H1
E156: J5.3 U5.J2
E157: J5.68 U5.J1
E158: J5.2 U5.K2
E159: J5.53 U5.B9
E160: J5.52 U5.A10
E161: J5.19 U5.B10
E162: J5.51 U5.A11
E163: J5.20 U5.B11
E164: J5.50 U5.A12
E165: J5.21 U5.B12
E166: J5.49 U5.A13
E167: J5.22 U5.B13
E168: J5.48 U5.A14
E169: J5.23 U5.B14
E170: J5.47 U5.A15
E171: J5.24 U5.B15
E172: J5.46 U5.A16
E173: J5.25 U5.B16
E174: J5.45 U5.A17
E175: J5.26 U5.B17
E176: J5.44 U5.C16
E177: J5.27 U5.C17
E178: J5.43 U5.D16
E179: J5.28 U5.D17
E180: J5.42 U5.E16
E181: J5.29 U5.E17
E182: J5.41 U5.F16
E183: J5.30 U5.F17
E184: J5.40 U5.G16
E185: J5.31 U5.G17
E186: J5.39 U5.H16
E187: J5.32 U5.H17
E188: J5.38 U5.J16
E189: J5.33 U5.J17
E190: J5.37 U5.K16
E191: J5.18 U5.A9
E192: J7.17 U7.A8
E193: J7.54 U7.B8
E194: J7.16 U7.A7
E195: J7.55 U7.B7
E196: J7.15 U7.A6
E197: J7.56 U7.B6
E198: J7.14 U7.A5
E199: J7.57 U7.B5
E200: J7.13 U7.A4
E201: J7.58 U7.B4
E202: J7.12 U7.A3
E203: J7.59 U7.B3
E204: J7.11 U7.A2
E205: J7.60 U7.B2
E206: J7.10 U7.A1
E207: J7.61 U7.B1
E208: J7.9 U7.C2
E209: J7.62 U7.C1
E210: J7.8 U7.D2
E211: J7.63 U7.D1
E212: J7.7 U7.E2
E213: J7.64 U7.E1
E214: J7.6 U7.F2
E215: J7.65 U7.F1
E216: J7.5 U7.G2
E217: J7.66 U7.G1
E218: J7.4 U7.H2
E219: J7.67 U7.H1
E220: J7.3 U7.J2
E221: J7.68 U7.J1
E222: J7.2 U7.K2
E223: J7.53 U7.B9
E224: J7.52 U7.A10
E225: J7.19 U7.B10
E226: J7.51 U7.A11
E227: J7.20 U7.B11
E228: J7.50 U7.A12
E229: J7.21 U7.B12
E230: J7.49 U7.A13
E231: J7.22 U7.B13
E232: J7.48 U7.A14
E233: J7.23 U7.B14
E234: J7.47 U7.A15
E235: J7.24 U7.B15
E236: J7.46 U7.A16
E237: J7.25 U7.B16
E238: J7.45 U7.A17
E239: J7.26 U7.B17
E240: J7.44 U7.C16
E241: J7.27 U7.C17
E242: J7.43 U7.D16
E243: J7.28 U7.D17
E244: J7.42 U7.E16
E245: J7.29 U7.E17
E246: J7.41 U7.F16
E247: J7.30 U7.F17
E248: J7.40 U7.G16
E249: J7.31 U7.G17
E250: J7.39 U7.H16
E251: J7.32 U7.H17
E252: J7.38 U7.J16
E253: J7.33 U7.J17
E254: J7.37 U7.K16
E255: J7.18 U7.A9
E256: J9.17 U9.A8
E257: J9.54 U9.B8
E258: J9.16 U9.A7
E259: J9.55 U9.B7
E260: J9.15 U9.A6
E261: J9.56 U9.B6
E262: J9.14 U9.A5
E263: J9.57 U9.B5
E264: J9.13 U9.A4
E265: J9.58 U9.B4
E266: J9.12 U9.A3
E267: J9.59 U9.B3
E268: J9.11 U9.A2
E269: J9.60 U9.B2
E270: J9.10 U9.A1
E271: J9.61 U9.B1
E272: J9.9 U9.C2
E273: J9.62 U9.C1
E274: J9.8 U9.D2
E275: J9.63 U9.D1
E276: J9.7 U9.E2
E277: J9.64 U9.E1
E278: J9.6 U9.F2
E279: J9.65 U9.F1
E280: J9.5 U9.G2
E281: J9.66 U9.G1
E282: J9.4 U9.H2
E283: J9.67 U9.H1
E284: J9.3 U9.J2
E285: J9.68 U9.J1
E286: J9.2 U9.K2
E287: J9.53 U9.B9
E288: J9.52 U9.A10
E289: J9.19 U9.B10
E290: J9.51 U9.A11
E291: J9.20 U9.B11
E292: J9.50 U9.A12
E293: J9.21 U9.B12
E294: J9.49 U9.A13
E295: J9.22 U9.B13
E296: J9.48 U9.A14
E297: J9.23 U9.B14
E298: J9.47 U9.A15
E299: J9.24 U9.B15
E300: J9.46 U9.A16
E301: J9.25 U9.B16
E302: J9.45 U9.A17
E303: J9.26 U9.B17
E304: J9.44 U9.C16
E305: J9.27 U9.C17
E306: J9.43 U9.D16
E307: J9.28 U9.D17
E308: J9.42 U9.E16
E309: J9.29 U9.E17
E310: J9.41 U9.F16
E311: J9.30 U9.F17
E312: J9.40 U9.G16
E313: J9.31 U9.G17
E314: J9.39 U9.H16
E315: J9.32 U9.H17
E316: J9.38 U9.J16
E317: J9.33 U9.J17
E318: J9.37 U9.K16
E319: J9.18 U9.A9
E320: J11.17 U11.A8
E321: J11.54 U11.B8
E322: J11.16 U11.A7
E323: J11.55 U11.B7
E324: J11.15 U11.A6
E325: J11.56 U11.B6
E326: J11.14 U11.A5
E327: J11.57 U11.B5
E328: J11.13 U11.A4
E329: J11.58 U11.B4
E330: J11.12 U11.A3
E331: J11.59 U11.B3
E332: J11.11 U11.A2
E333: J11.60 U11.B2
E334: J11.10 U11.A1
E335: J11.61 U11.B1
E336: J11.9 U11.C2
E337: J11.62 U11.C1
E338: J11.8 U11.D2
E339: J11.63 U11.D1
E340: J11.7 U11.E2
E341: J11.64 U11.E1
E342: J11.6 U11.F2
E343: J11.65 U11.F1
E344: J11.5 U11.G2
E345: J11.66 U11.G1
E346: J11.4 U11.H2
E347: J11.67 U11.H1
E348: J11.3 U11.J2
E349: J11.68 U11.J1
E350: J11.2 U11.K2
E351: J11.53 U11.B9
E352: J11.52 U11.A10
E353: J11.19 U11.B10
E354: J11.51 U11.A11
E355: J11.20 U11.B11
E356: J11.50 U11.A12
E357: J11.21 U11.B12
E358: J11.49 U11.A13
E359: J11.22 U11.B13
E360: J11.48 U11.A14
E361: J11.23 U11.B14
E362: J11.47 U11.A15
E363: J11.24 U11.B15
E364: J11.46 U11.A16
E365: J11.25 U11.B16
E366: J11.45 U11.A17
E367: J11.26 U11.B17
E368: J11.44 U11.C16
E369: J11.27 U11.C17
E370: J11.43 U11.D16
E371: J11.28 U11.D17
E372: J11.42 U11.E16
E373: J11.29 U11.E17
E374: J11.41 U11.F16
E375: J11.30 U11.F17
E376: J11.40 U11.G16
E377: J11.31 U11.G17
E378: J11.39 U11.H16
E379: J11.32 U11.H17
E380: J11.38 U11.J16
E381: J11.33 U11.J17
E382: J11.37 U11.K16
E383: J11.18 U11.A9
E384: J13.17 U13.A8
E385: J13.54 U13.B8
E386: J13.16 U13.A7
E387: J13.55 U13.B7
E388: J13.15 U13.A6
E389: J13.56 U13.B6
E390: J13.14 U13.A5
E391: J13.57 U13.B5
E392: J13.13 U13.A4
E393: J13.58 U13.B4
E394: J13.12 U13.A3
E395: J13.59 U13.B3
E396: J13.11 U13.A2
E397: J13.60 U13.B2
E398: J13.10 U13.A1
E399: J13.61 U13.B1
E400: J13.9 U13.C2
E401: J13.62 U13.C1
E402: J13.8 U13.D2
E403: J13.63 U13.D1
E404: J13.7 U13.E2
E405: J13.64 U13.E1
E406: J13.6 U13.F2
E407: J13.65 U13.F1
E408: J13.5 U13.G2
E409: J13.66 U13.G1
E410: J13.4 U13.H2
E411: J13.67 U13.H1
E412: J13.3 U13.J2
E413: J13.68 U13.J1
E414: J13.2 U13.K2
E415: J13.53 U13.B9
E416: J13.52 U13.A10
E417: J13.19 U13.B10
E418: J13.51 U13.A11
E419: J13.20 U13.B11
E420: J13.50 U13.A12
E421: J13.21 U13.B12
E422: J13.49 U13.A13
E423: J13.22 U13.B13
E424: J13.48 U13.A14
E425: J13.23 U13.B14
E426: J13.47 U13.A15
E427: J13.24 U13.B15
E428: J13.46 U13.A16
E429: J13.25 U13.B16
E430: J13.45 U13.A17
E431: J13.26 U13.B17
E432: J13.44 U13.C16
E433: J13.27 U13.C17
E434: J13.43 U13.D16
E435: J13.28 U13.D17
E436: J13.42 U13.E16
E437: J13.29 U13.E17
E438: J13.41 U13.F16
E439: J13.30 U13.F17
E440: J13.40 U13.G16
E441: J13.31 U13.G17
E442: J13.39 U13.H16
E443: J13.32 U13.H17
E444: J13.38 U13.J16
E445: J13.33 U13.J17
E446: J13.37 U13.K16
E447: J13.18 U13.A9
E448: J15.17 U15.A8
E449: J15.54 U15.B8
E450: J15.16 U15.A7
E451: J15.55 U15.B7
E452: J15.15 U15.A6
E453: J15.56 U15.B6
E454: J15.14 U15.A5
E455: J15.57 U15.B5
E456: J15.13 U15.A4
E457: J15.58 U15.B4
E458: J15.12 U15.A3
E459: J15.59 U15.B3
E460: J15.11 U15.A2
E461: J15.60 U15.B2
E462: J15.10 U15.A1
E463: J15.61 U15.B1
E464: J15.9 U15.C2
E465: J15.62 U15.C1
E466: J15.8 U15.D2
E467: J15.63 U15.D1
E468: J15.7 U15.E2
E469: J15.64 U15.E1
E470: J15.6 U15.F2
E471: J15.65 U15.F1
E472: J15.5 U15.G2
E473: J15.66 U15.G1
E474: J15.4 U15.H2
E475: J15.67 U15.H1
E476: J15.3 U15.J2
E477: J15.68 U15.J1
E478: J15.2 U15.K2
E479: J15.53 U15.B9
E480: J15.52 U15.A10
E481: J15.19 U15.B10
E482: J15.51 U15.A11
E483: J15.20 U15.B11
E484: J15.50 U15.A12
E485: J15.21 U15.B12
E486: J15.49 U15.A13
E487: J15.22 U15.B13
E488: J15.48 U15.A14
E489: J15.23 U15.B14
E490: J15.47 U15.A15
E491: J15.24 U15.B15
E492: J15.46 U15.A16
E493: J15.25 U15.B16
E494: J15.45 U15.A17
E495: J15.26 U15.B17
E496: J15.44 U15.C16
E497: J15.27 U15.C17
E498: J15.43 U15.D16
E499: J15.28 U15.D17
E500: J15.42 U15.E16
E501: J15.29 U15.E17
E502: J15.41 U15.F16
E503: J15.30 U15.F17
E504: J15.40 U15.G16
E505: J15.31 U15.G17
E506: J15.39 U15.H16
E507: J15.32 U15.H17
E508: J15.38 U15.J16
E509: J15.33 U15.J17
E510: J15.37 U15.K16
E511: J15.18 U15.A9
E512: J17.17 U17.A8
E513: J17.54 U17.B8
E514: J17.16 U17.A7
E515: J17.55 U17.B7
E516: J17.15 U17.A6
E517: J17.56 U17.B6
E518: J17.14 U17.A5
E519: J17.57 U17.B5
E520: J17.13 U17.A4
E521: J17.58 U17.B4
E522: J17.12 U17.A3
E523: J17.59 U17.B3
E524: J17.11 U17.A2
E525: J17.60 U17.B2
E526: J17.10 U17.A1
E527: J17.61 U17.B1
E528: J17.9 U17.C2
E529: J17.62 U17.C1
E530: J17.8 U17.D2
E531: J17.63 U17.D1
E532: J17.7 U17.E2
E533: J17.64 U17.E1
E534: J17.6 U17.F2
E535: J17.65 U17.F1
E536: J17.5 U17.G2
E537: J17.66 U17.G1
E538: J17.4 U17.H2
E539: J17.67 U17.H1
E540: J17.3 U17.J2
E541: J17.68 U17.J1
E542: J17.2 U17.K2
E543: J17.53 U17.B9
E544: J17.52 U17.A10
E545: J17.19 U17.B10
E546: J17.51 U17.A11
E547: J17.20 U17.B11
E548: J17.50 U17.A12
E549: J17.21 U17.B12
E550: J17.49 U17.A13
E551: J17.22 U17.B13
E552: J17.48 U17.A14
E553: J17.23 U17.B14
E554: J17.47 U17.A15
E555: J17.24 U17.B15
E556: J17.46 U17.A16
E557: J17.25 U17.B16
E558: J17.45 U17.A17
E559: J17.26 U17.B17
E560: J17.44 U17.C16
E561: J17.27 U17.C17
E562: J17.43 U17.D16
E563: J17.28 U17.D17
E564: J17.42 U17.E16
E565: J17.29 U17.E17
E566: J17.41 U17.F16
E567: J17.30 U17.F17
E568: J17.40 U17.G16
E569: J17.31 U17.G17
E570: J17.39 U17.H16
E571: J17.32 U17.H17
E572: J17.38 U17.J16
E573: J17.33 U17.J17
E574: J17.37 U17.K16
E575: J17.18 U17.A9
ISTIM: J1.1
ISTIM1: J3.1
ISTIM2: J5.1
ISTIM3: J7.1
ISTIM4: J9.1
ISTIM5: J11.1
ISTIM6: J13.1
ISTIM7: J15.1
ISTIM8: J17.1
LED-1: J1.34
LED-2: J1.35
LED-3: J3.35
LED-4: J3.34
LED-5: J5.35
LED-6: J5.34
LED-7: J7.35
LED-8: J7.34
LED-9: J9.35
LED-10: J9.34
LED-11: J11.35
LED-12: J11.34
LED-13: J13.35
LED-14: J13.34
LED-15: J15.35
LED-16: J15.34
LED-17: J17.35
LED-18: J17.34
N$1: J2.3
N$2: J2.4
N$3: IR2.K R5.1
N$4: IR1.K R6.1
N$5: C8.1 U3.N17
N$6: TP3.TP U3.N16
N$7: J4.3
N$8: J4.4
N$9: IR4.K R11.1
N$10: IR3.K R12.1
N$11: C15.1 U5.N17
N$12: TP5.TP U5.N16
N$13: J6.3
N$14: J6.4
N$15: IR6.K R17.1
N$16: IR5.K R18.1
N$17: C22.1 U7.N17
N$18: TP7.TP U7.N16
N$19: J8.3
N$20: J8.4
N$21: IR8.K R23.1
N$22: IR7.K R24.1
N$23: C29.1 U9.N17
N$24: TP9.TP U9.N16
N$25: J10.3
N$26: J10.4
N$27: IR10.K R29.1
N$28: IR9.K R30.1
N$29: C36.1 U11.N17
N$30: TP11.TP U11.N16
N$31: J12.3
N$32: J12.4
N$33: IR12.K R35.1
N$34: IR11.K R36.1
N$35: C43.1 U13.N17
N$36: C5.1 U1.N17
N$37: TP13.TP U13.N16
N$38: J14.3
N$39: TP2.TP U1.N16
N$40: J14.4
N$41: IR14.K R41.1
N$42: IR13.K R42.1
N$43: C50.1 U15.N17
N$44: TP15.TP U15.N16
N$45: J16.3
N$46: J16.4
N$47: IR16.K R47.1
N$48: IR15.K R48.1
N$49: C57.1 U17.N17
N$50: TP17.TP U17.N16
N$51: J18.3
N$52: J18.4
N$53: IR18.K R53.1
N$54: IR17.K R54.1
REF: J1.69 R1.2 REF.1 U1.M1
REF1: J3.69 R10.2 REF1.1 U3.M1
REF2: J5.69 R16.2 REF2.1 U5.M1
REF3: J7.69 R22.2 REF3.1 U7.M1
REF4: J9.69 R28.2 REF4.1 U9.M1
REF5: J11.69 R34.2 REF5.1 U11.M1
REF6: J13.69 R40.2 REF6.1 U13.M1
REF7: J15.69 R46.2 REF7.1 U15.M1
REF8: J17.69 R52.2 REF8.1 U17.M1
RHD_CLK_N [diff]: J2.9 R3.1 U1.N9
RHD_CLK_N1 [diff]: J4.9 R8.1 U3.N9
RHD_CLK_N2 [diff]: J6.9 R14.1 U5.N9
RHD_CLK_N3 [diff]: J8.9 R20.1 U7.N9
RHD_CLK_N4 [diff]: J10.9 R26.1 U9.N9
RHD_CLK_N5 [diff]: J12.9 R32.1 U11.N9
RHD_CLK_N6 [diff]: J14.9 R38.1 U13.N9
RHD_CLK_N7 [diff]: J16.9 R44.1 U15.N9
RHD_CLK_N8 [diff]: J18.9 R50.1 U17.N9
RHD_CLK_P [diff]: J2.10 R3.2 U1.N10
RHD_CLK_P1 [diff]: J4.10 R8.2 U3.N10
RHD_CLK_P2 [diff]: J6.10 R14.2 U5.N10
RHD_CLK_P3 [diff]: J8.10 R20.2 U7.N10
RHD_CLK_P4 [diff]: J10.10 R26.2 U9.N10
RHD_CLK_P5 [diff]: J12.10 R32.2 U11.N10
RHD_CLK_P6 [diff]: J14.10 R38.2 U13.N10
RHD_CLK_P7 [diff]: J16.10 R44.2 U15.N10
RHD_CLK_P8 [diff]: J18.10 R50.2 U17.N10
RHD_CS_N [diff]: J2.11 R2.1 U1.N7
RHD_CS_N1 [diff]: J4.11 R7.1 U3.N7
RHD_CS_N2 [diff]: J6.11 R13.1 U5.N7
RHD_CS_N3 [diff]: J8.11 R19.1 U7.N7
RHD_CS_N4 [diff]: J10.11 R25.1 U9.N7
RHD_CS_N5 [diff]: J12.11 R31.1 U11.N7
RHD_CS_N6 [diff]: J14.11 R37.1 U13.N7
RHD_CS_N7 [diff]: J16.11 R43.1 U15.N7
RHD_CS_N8 [diff]: J18.11 R49.1 U17.N7
RHD_CS_P [diff]: J2.12 R2.2 U1.N8
RHD_CS_P1 [diff]: J4.12 R7.2 U3.N8
RHD_CS_P2 [diff]: J6.12 R13.2 U5.N8
RHD_CS_P3 [diff]: J8.12 R19.2 U7.N8
RHD_CS_P4 [diff]: J10.12 R25.2 U9.N8
RHD_CS_P5 [diff]: J12.12 R31.2 U11.N8
RHD_CS_P6 [diff]: J14.12 R37.2 U13.N8
RHD_CS_P7 [diff]: J16.12 R43.2 U15.N8
RHD_CS_P8 [diff]: J18.12 R49.2 U17.N8
RHD_MISO_N [diff]: J2.5 U1.N13
RHD_MISO_N1 [diff]: J4.5 U3.N13
RHD_MISO_N2 [diff]: J6.5 U5.N13
RHD_MISO_N3 [diff]: J8.5 U7.N13
RHD_MISO_N4 [diff]: J10.5 U9.N13
RHD_MISO_N5 [diff]: J12.5 U11.N13
RHD_MISO_N6 [diff]: J14.5 U13.N13
RHD_MISO_N7 [diff]: J16.5 U15.N13
RHD_MISO_N8 [diff]: J18.5 U17.N13
RHD_MISO_P [diff]: J2.6 U1.N14
RHD_MISO_P1 [diff]: J4.6 U3.N14
RHD_MISO_P2 [diff]: J6.6 U5.N14
RHD_MISO_P3 [diff]: J8.6 U7.N14
RHD_MISO_P4 [diff]: J10.6 U9.N14
RHD_MISO_P5 [diff]: J12.6 U11.N14
RHD_MISO_P6 [diff]: J14.6 U13.N14
RHD_MISO_P7 [diff]: J16.6 U15.N14
RHD_MISO_P8 [diff]: J18.6 U17.N14
RHD_MOSI_N [diff]: J2.7 R4.1 U1.N11
RHD_MOSI_N1 [diff]: J4.7 R9.1 U3.N11
RHD_MOSI_N2 [diff]: J6.7 R15.1 U5.N11
RHD_MOSI_N3 [diff]: J8.7 R21.1 U7.N11
RHD_MOSI_N4 [diff]: J10.7 R27.1 U9.N11
RHD_MOSI_N5 [diff]: J12.7 R33.1 U11.N11
RHD_MOSI_N6 [diff]: J14.7 R39.1 U13.N11
RHD_MOSI_N7 [diff]: J16.7 R45.1 U15.N11
RHD_MOSI_N8 [diff]: J18.7 R51.1 U17.N11
RHD_MOSI_P [diff]: J2.8 R4.2 U1.N12
RHD_MOSI_P1 [diff]: J4.8 R9.2 U3.N12
RHD_MOSI_P2 [diff]: J6.8 R15.2 U5.N12
RHD_MOSI_P3 [diff]: J8.8 R21.2 U7.N12
RHD_MOSI_P4 [diff]: J10.8 R27.2 U9.N12
RHD_MOSI_P5 [diff]: J12.8 R33.2 U11.N12
RHD_MOSI_P6 [diff]: J14.8 R39.2 U13.N12
RHD_MOSI_P7 [diff]: J16.8 R45.2 U15.N12
RHD_MOSI_P8 [diff]: J18.8 R51.2 U17.N12
VCOAX: J1.36 J1.M3
VCOAX1: J3.36 J3.M3
VCOAX2: J5.36 J5.M3
VCOAX3: J7.36 J7.M3
VCOAX4: J9.36 J9.M3
VCOAX5: J11.36 J11.M3
VCOAX6: J13.36 J13.M3
VCOAX7: J15.36 J15.M3
VCOAX8: J17.36 J17.M3
XOUT: C2.1 U1.N3 U2.12
XOUT1: C12.1 U3.N3 U4.12
XOUT2: C19.1 U5.N3 U6.12
XOUT3: C26.1 U7.N3 U8.12
XOUT4: C33.1 U9.N3 U10.12
XOUT5: C40.1 U11.N3 U12.12
XOUT6: C47.1 U13.N3 U14.12
XOUT7: C54.1 U15.N3 U16.12
XOUT8: C61.1 U17.N3 U18.12
YOUT: C3.1 U1.N4 U2.10
YOUT1: C10.1 U3.N4 U4.10
YOUT2: C17.1 U5.N4 U6.10
YOUT3: C24.1 U7.N4 U8.10
YOUT4: C31.1 U9.N4 U10.10
YOUT5: C38.1 U11.N4 U12.10
YOUT6: C45.1 U13.N4 U14.10
YOUT7: C52.1 U15.N4 U16.10
YOUT8: C59.1 U17.N4 U18.10
ZOUT: C4.1 U1.N5 U2.8
ZOUT1: C11.1 U3.N5 U4.8
ZOUT2: C18.1 U5.N5 U6.8
ZOUT3: C25.1 U7.N5 U8.8
ZOUT4: C32.1 U9.N5 U10.8
ZOUT5: C39.1 U11.N5 U12.8
ZOUT6: C46.1 U13.N5 U14.8
ZOUT7: C53.1 U15.N5 U16.8
ZOUT8: C60.1 U17.N5 U18.8

## Tracks (layer width: path | path; a pad name or v marks a point on that pad's centre or on a via)
+3V3_AN  (via drill 0.2)
  Top 0.3: C7.1 12.77,19.46 | U2.15 U2.14 | 24,21.14 C1.1
  Top 0.305: 12.77,19.46 12.27,19.96 12.27,21.33 | 23.7,22.4 23.7,22.7 | 23.7,22.7 23.7,24.19 IR2.A | v10.76,14.51 10.84,14.41 11.12,14.13 11.12,13.71 IR1.A | 23.39,22.39 23.7,22.7
  Top 0.381: J2.2 14.11,18.86 13.51,19.46 C7.1
  Top 0.406: C7.1 13.02,18.32 11,16.3 11,14.75 v10.76,14.51 | C1.1 24,21.37 | U2.15 23.82,18.72 24,18.9 24,21.14 24,21.37 | 12.51,22.4 23.7,22.4 24,22.1 24,21.37 | 12.51,22.4 12.27,22.16 | 12.27,22.16 12.27,21.33 | 12.51,22.4 10.98,22.4 VDD.1 | 12.03,22.38 12.27,22.14 12.27,22.15 12.27,22.16
  Bottom 0.09: 11.9,13.24 11.85,13.24 11.84,13.25
  Bottom 0.1: 18.91,12.94 19.25,12.6 19.25,12.25 | 12.67,13.24 11.9,13.24 | 12.96,13.03 13,12.98 13,12.94 | U1.M16 U1.M15
  Bottom 0.15: 13,12.94 18.91,12.94
  Bottom 0.152: U1.M15 13,12.94 | C6.2 11.12,14.01 11.19,13.94
  Bottom 0.2: U1.N2 19.25,12.25 | 11.71,13.41 11.12,14.01 11.1,14.03 11.1,14.06 | 11.71,13.41 11.71,13.38 11.84,13.25 | 12.96,13.03 12.74,13.24 12.67,13.24 | 13,12.98 U1.M15 U1.N15 | 11.19,13.94 11.71,13.41
  Bottom 0.3: 10.89,14.26 10.61,14.54 v10.76,14.51
  Bottom 0.305: 10.89,14.26 11.1,14.06
+3V3_AN1  (via drill 0.2)
  Top 0.3: C14.1 38.17,19.46 | U4.15 U4.14 | 49.4,21.14 C13.1
  Top 0.305: 38.17,19.46 37.67,19.96 37.67,21.33 | 49.1,22.4 49.1,22.7 | 49.1,22.7 49.1,24.19 IR4.A | v36.16,14.51 36.24,14.41 36.52,14.13 36.52,13.71 IR3.A | 48.79,22.39 49.1,22.7
  Top 0.381: J4.2 39.51,18.86 38.91,19.46 C14.1
  Top 0.406: C14.1 38.42,18.32 36.4,16.3 36.4,14.75 v36.16,14.51 | C13.1 49.4,21.37 | U4.15 49.22,18.72 49.4,18.9 49.4,21.14 49.4,21.37 | 37.91,22.4 49.1,22.4 49.4,22.1 49.4,21.37 | 37.91,22.4 37.67,22.16 | 37.67,22.16 37.67,21.33 | 37.91,22.4 36.38,22.4 VDD1.1 | 37.42,22.38 37.67,22.14 37.67,22.15 37.67,22.16
  Bottom 0.09: 37.3,13.24 37.25,13.24 37.24,13.25
  Bottom 0.1: 44.31,12.94 44.65,12.6 44.65,12.25 | 38.07,13.24 37.3,13.24 | 38.36,13.03 38.4,12.98 38.4,12.94 | U3.M16 U3.M15
  Bottom 0.15: 38.4,12.94 44.31,12.94
  Bottom 0.152: U3.M15 38.4,12.94 | C9.2 36.52,14.01 36.59,13.94
  Bottom 0.2: U3.N2 44.65,12.25 | 37.11,13.41 36.52,14.01 36.5,14.03 36.5,14.06 | 37.11,13.41 37.11,13.38 37.24,13.25 | 38.36,13.03 38.14,13.24 38.07,13.24 | 38.4,12.98 U3.M15 U3.N15 | 36.59,13.94 37.11,13.41
  Bottom 0.3: 36.3,14.26 36.01,14.54 v36.16,14.51
  Bottom 0.305: 36.3,14.26 36.5,14.06
+3V3_AN2  (via drill 0.2)
  Top 0.3: C21.1 63.57,19.46 | U6.15 U6.14 | 74.8,21.14 C20.1
  Top 0.305: 63.57,19.46 63.07,19.96 63.07,21.33 | 74.5,22.4 74.5,22.7 | 74.5,22.7 74.5,24.19 IR6.A | v61.56,14.51 61.64,14.41 61.92,14.13 61.92,13.71 IR5.A | 74.19,22.39 74.5,22.7
  Top 0.381: J6.2 64.91,18.86 64.31,19.46 C21.1
  Top 0.406: C21.1 63.82,18.32 61.8,16.3 61.8,14.75 v61.56,14.51 | C20.1 74.8,21.37 | U6.15 74.62,18.72 74.8,18.9 74.8,21.14 74.8,21.37 | 63.31,22.4 74.5,22.4 74.8,22.1 74.8,21.37 | 63.31,22.4 63.07,22.16 | 63.07,22.16 63.07,21.33 | 63.31,22.4 61.78,22.4 VDD2.1 | 62.83,22.38 63.07,22.14 63.07,22.15 63.07,22.16
  Bottom 0.09: 62.7,13.24 62.65,13.24 62.64,13.25
  Bottom 0.1: 69.71,12.94 70.05,12.6 70.05,12.25 | 63.47,13.24 62.7,13.24 | 63.76,13.03 63.8,12.98 63.8,12.94 | U5.M16 U5.M15
  Bottom 0.15: 63.8,12.94 69.71,12.94
  Bottom 0.152: U5.M15 63.8,12.94 | C16.2 61.92,14.01 61.99,13.94
  Bottom 0.2: U5.N2 70.05,12.25 | 62.51,13.41 61.92,14.01 61.9,14.03 61.9,14.06 | 62.51,13.41 62.51,13.38 62.64,13.25 | 63.76,13.03 63.54,13.24 63.47,13.24 | 63.8,12.98 U5.M15 U5.N15 | 61.99,13.94 62.51,13.41
  Bottom 0.3: 61.7,14.26 61.41,14.54 v61.56,14.51
  Bottom 0.305: 61.7,14.26 61.9,14.06
+3V3_AN3  (via drill 0.2)
  Top 0.3: C28.1 12.77,44.86 | U8.15 U8.14 | 24,46.54 C27.1
  Top 0.305: 12.77,44.86 12.27,45.36 12.27,46.73 | 23.7,47.8 23.7,48.1 | 23.7,48.1 23.7,49.59 IR8.A | v10.76,39.91 10.84,39.81 11.12,39.53 11.12,39.11 IR7.A | 23.39,47.79 23.7,48.1
  Top 0.381: J8.2 14.11,44.26 13.51,44.86 C28.1
  Top 0.406: C28.1 13.02,43.72 11,41.7 11,40.14 v10.76,39.91 | C27.1 24,46.77 | U8.15 23.82,44.12 24,44.3 24,46.54 24,46.77 | 12.51,47.8 23.7,47.8 24,47.5 24,46.77 | 12.51,47.8 12.27,47.56 | 12.27,47.56 12.27,46.73 | 12.51,47.8 10.98,47.8 VDD3.1 | 12.03,47.78 12.27,47.54 12.27,47.55 12.27,47.56
  Bottom 0.09: 11.9,38.64 11.85,38.64 11.84,38.65
  Bottom 0.1: 18.91,38.34 19.25,38 19.25,37.65 | 12.67,38.64 11.9,38.64 | 12.96,38.42 13,38.38 13,38.34 | U7.M16 U7.M15
  Bottom 0.15: 13,38.34 18.91,38.34
  Bottom 0.152: U7.M15 13,38.34 | C23.2 11.12,39.41 11.19,39.34
  Bottom 0.2: U7.N2 19.25,37.65 | 11.71,38.81 11.12,39.41 11.1,39.43 11.1,39.46 | 11.71,38.81 11.71,38.78 11.84,38.65 | 12.96,38.42 12.74,38.64 12.67,38.64 | 13,38.38 U7.M15 U7.N15 | 11.19,39.34 11.71,38.81
  Bottom 0.3: 10.89,39.66 10.61,39.94 v10.76,39.91
  Bottom 0.305: 10.89,39.66 11.1,39.46
+3V3_AN4  (via drill 0.2)
  Top 0.3: C35.1 38.17,44.86 | U10.15 U10.14 | 49.4,46.54 C34.1
  Top 0.305: 38.17,44.86 37.67,45.36 37.67,46.73 | 49.1,47.8 49.1,48.1 | 49.1,48.1 49.1,49.59 IR10.A | v36.16,39.91 36.24,39.81 36.52,39.53 36.52,39.11 IR9.A | 48.79,47.79 49.1,48.1
  Top 0.381: J10.2 39.51,44.26 38.91,44.86 C35.1
  Top 0.406: C35.1 38.42,43.72 36.4,41.7 36.4,40.14 v36.16,39.91 | C34.1 49.4,46.77 | U10.15 49.22,44.12 49.4,44.3 49.4,46.54 49.4,46.77 | 37.91,47.8 49.1,47.8 49.4,47.5 49.4,46.77 | 37.91,47.8 37.67,47.56 | 37.67,47.56 37.67,46.73 | 37.91,47.8 36.38,47.8 VDD4.1 | 37.42,47.78 37.67,47.54 37.67,47.55 37.67,47.56
  Bottom 0.09: 37.3,38.64 37.25,38.64 37.24,38.65
  Bottom 0.1: 44.31,38.34 44.65,38 44.65,37.65 | 38.07,38.64 37.3,38.64 | 38.36,38.42 38.4,38.38 38.4,38.34 | U9.M16 U9.M15
  Bottom 0.15: 38.4,38.34 44.31,38.34
  Bottom 0.152: U9.M15 38.4,38.34 | C30.2 36.52,39.41 36.59,39.34
  Bottom 0.2: U9.N2 44.65,37.65 | 37.11,38.81 36.52,39.41 36.5,39.43 36.5,39.46 | 37.11,38.81 37.11,38.78 37.24,38.65 | 38.36,38.42 38.14,38.64 38.07,38.64 | 38.4,38.38 U9.M15 U9.N15 | 36.59,39.34 37.11,38.81
  Bottom 0.3: 36.3,39.66 36.01,39.94 v36.16,39.91
  Bottom 0.305: 36.3,39.66 36.5,39.46
+3V3_AN5  (via drill 0.2)
  Top 0.3: C42.1 63.57,44.86 | U12.15 U12.14 | 74.8,46.54 C41.1
  Top 0.305: 63.57,44.86 63.07,45.36 63.07,46.73 | 74.5,47.8 74.5,48.1 | 74.5,48.1 74.5,49.59 IR12.A | v61.56,39.91 61.64,39.81 61.92,39.53 61.92,39.11 IR11.A | 74.19,47.79 74.5,48.1
  Top 0.381: J12.2 64.91,44.26 64.31,44.86 C42.1
  Top 0.406: C42.1 63.82,43.72 61.8,41.7 61.8,40.14 v61.56,39.91 | C41.1 74.8,46.77 | U12.15 74.62,44.12 74.8,44.3 74.8,46.54 74.8,46.77 | 63.31,47.8 74.5,47.8 74.8,47.5 74.8,46.77 | 63.31,47.8 63.07,47.56 | 63.07,47.56 63.07,46.73 | 63.31,47.8 61.78,47.8 VDD5.1 | 62.83,47.78 63.07,47.54 63.07,47.55 63.07,47.56
  Bottom 0.09: 62.7,38.64 62.65,38.64 62.64,38.65
  Bottom 0.1: 69.71,38.34 70.05,38 70.05,37.65 | 63.47,38.64 62.7,38.64 | 63.76,38.42 63.8,38.38 63.8,38.34 | U11.M16 U11.M15
  Bottom 0.15: 63.8,38.34 69.71,38.34
  Bottom 0.152: U11.M15 63.8,38.34 | C37.2 61.92,39.41 61.99,39.34
  Bottom 0.2: U11.N2 70.05,37.65 | 62.51,38.81 61.92,39.41 61.9,39.43 61.9,39.46 | 62.51,38.81 62.51,38.78 62.64,38.65 | 63.76,38.42 63.54,38.64 63.47,38.64 | 63.8,38.38 U11.M15 U11.N15 | 61.99,39.34 62.51,38.81
  Bottom 0.3: 61.7,39.66 61.41,39.94 v61.56,39.91
  Bottom 0.305: 61.7,39.66 61.9,39.46
+3V3_AN6  (via drill 0.2)
  Top 0.3: C49.1 12.77,70.26 | U14.15 U14.14 | 24,71.94 C48.1
  Top 0.305: 12.77,70.26 12.27,70.76 12.27,72.13 | 23.7,73.2 23.7,73.5 | 23.7,73.5 23.7,74.99 IR14.A | v10.76,65.31 10.84,65.22 11.12,64.93 11.12,64.51 IR13.A | 23.39,73.19 23.7,73.5
  Top 0.381: J14.2 14.11,69.66 13.51,70.26 C49.1
  Top 0.406: C49.1 13.02,69.12 11,67.1 11,65.55 v10.76,65.31 | C48.1 24,72.17 | U14.15 23.82,69.52 24,69.7 24,71.94 24,72.17 | 12.51,73.2 23.7,73.2 24,72.9 24,72.17 | 12.51,73.2 12.27,72.96 | 12.27,72.96 12.27,72.13 | 12.51,73.2 10.98,73.2 VDD6.1 | 12.03,73.18 12.27,72.94 12.27,72.95 12.27,72.96
  Bottom 0.09: 11.9,64.04 11.85,64.04 11.84,64.05
  Bottom 0.1: 18.91,63.74 19.25,63.4 19.25,63.05 | 12.67,64.04 11.9,64.04 | 12.96,63.83 13,63.78 13,63.74 | U13.M16 U13.M15
  Bottom 0.15: 13,63.74 18.91,63.74
  Bottom 0.152: U13.M15 13,63.74 | C44.2 11.12,64.81 11.19,64.74
  Bottom 0.2: U13.N2 19.25,63.05 | 11.71,64.21 11.12,64.81 11.1,64.83 11.1,64.86 | 11.71,64.21 11.71,64.18 11.84,64.05 | 12.96,63.83 12.74,64.04 12.67,64.04 | 13,63.78 U13.M15 U13.N15 | 11.19,64.74 11.71,64.21
  Bottom 0.3: 10.89,65.06 10.61,65.34 v10.76,65.31
  Bottom 0.305: 10.89,65.06 11.1,64.86
+3V3_AN7  (via drill 0.2)
  Top 0.3: C56.1 38.17,70.26 | U16.15 U16.14 | 49.4,71.94 C55.1
  Top 0.305: 38.17,70.26 37.67,70.76 37.67,72.13 | 49.1,73.2 49.1,73.5 | 49.1,73.5 49.1,74.99 IR16.A | v36.16,65.31 36.24,65.22 36.52,64.93 36.52,64.51 IR15.A | 48.79,73.19 49.1,73.5
  Top 0.381: J16.2 39.51,69.66 38.91,70.26 C56.1
  Top 0.406: C56.1 38.42,69.12 36.4,67.1 36.4,65.55 v36.16,65.31 | C55.1 49.4,72.17 | U16.15 49.22,69.52 49.4,69.7 49.4,71.94 49.4,72.17 | 37.91,73.2 49.1,73.2 49.4,72.9 49.4,72.17 | 37.91,73.2 37.67,72.96 | 37.67,72.96 37.67,72.13 | 37.91,73.2 36.38,73.2 VDD7.1 | 37.42,73.18 37.67,72.94 37.67,72.95 37.67,72.96
  Bottom 0.09: 37.3,64.04 37.25,64.04 37.24,64.05
  Bottom 0.1: 44.31,63.74 44.65,63.4 44.65,63.05 | 38.07,64.04 37.3,64.04 | 38.36,63.83 38.4,63.78 38.4,63.74 | U15.M16 U15.M15
  Bottom 0.15: 38.4,63.74 44.31,63.74
  Bottom 0.152: U15.M15 38.4,63.74 | C51.2 36.52,64.81 36.59,64.74
  Bottom 0.2: U15.N2 44.65,63.05 | 37.11,64.21 36.52,64.81 36.5,64.83 36.5,64.86 | 37.11,64.21 37.11,64.18 37.24,64.05 | 38.36,63.83 38.14,64.04 38.07,64.04 | 38.4,63.78 U15.M15 U15.N15 | 36.59,64.74 37.11,64.21
  Bottom 0.3: 36.3,65.06 36.01,65.34 v36.16,65.31
  Bottom 0.305: 36.3,65.06 36.5,64.86
+3V3_AN8  (via drill 0.2)
  Top 0.3: C63.1 63.57,70.26 | U18.15 U18.14 | 74.8,71.94 C62.1
  Top 0.305: 63.57,70.26 63.07,70.76 63.07,72.13 | 74.5,73.2 74.5,73.5 | 74.5,73.5 74.5,74.99 IR18.A | v61.56,65.31 61.64,65.22 61.92,64.93 61.92,64.51 IR17.A | 74.19,73.19 74.5,73.5
  Top 0.381: J18.2 64.91,69.66 64.31,70.26 C63.1
  Top 0.406: C63.1 63.82,69.12 61.8,67.1 61.8,65.55 v61.56,65.31 | C62.1 74.8,72.17 | U18.15 74.62,69.52 74.8,69.7 74.8,71.94 74.8,72.17 | 63.31,73.2 74.5,73.2 74.8,72.9 74.8,72.17 | 63.31,73.2 63.07,72.96 | 63.07,72.96 63.07,72.13 | 63.31,73.2 61.78,73.2 VDD8.1 | 62.83,73.18 63.07,72.94 63.07,72.95 63.07,72.96
  Bottom 0.09: 62.7,64.04 62.65,64.04 62.64,64.05
  Bottom 0.1: 69.71,63.74 70.05,63.4 70.05,63.05 | 63.47,64.04 62.7,64.04 | 63.76,63.83 63.8,63.78 63.8,63.74 | U17.M16 U17.M15
  Bottom 0.15: 63.8,63.74 69.71,63.74
  Bottom 0.152: U17.M15 63.8,63.74 | C58.2 61.92,64.81 61.99,64.74
  Bottom 0.2: U17.N2 70.05,63.05 | 62.51,64.21 61.92,64.81 61.9,64.83 61.9,64.86 | 62.51,64.21 62.51,64.18 62.64,64.05 | 63.76,63.83 63.54,64.04 63.47,64.04 | 63.8,63.78 U17.M15 U17.N15 | 61.99,64.74 62.51,64.21
  Bottom 0.3: 61.7,65.06 61.41,65.34 v61.56,65.31
  Bottom 0.305: 61.7,65.06 61.9,64.86
AGND6  (via drill 0.2 pad 0.25)
  Bottom 0.127: J1.M4 J1.70
  Bottom 0.2: v11.58,12.45 11.95,12.45 U1.M17
  other vias: 24.26,23.81 20.39,23.7 19.35,23.45 18.73,24.22 20.88,12.25 13.79,25.97 19.56,26.5 21.79,13.02 22.29,13.46 13.14,21.62 12.85,21.25 13.44,21.21 22.82,20.45 8.31,15.16 7.18,18.1 9.22,16.85 7.75,18.53 23.87,15.47 24.76,17.83 24.05,16.66 24.04,17.96 22.78,24.07 19.03,25.81 13.68,28.56 7.33,21.75 24.79,21.84 21.22,13.44 17.43,11.63 12.29,25.97 23.42,20.25 14.8,13.58 16.5,14.18 13.59,13.71 15.7,10.88 9.54,13.57 14.42,15.94 9.59,25.56
  pour Top (isolate 0.05, rank 3): 4.6,29.8 26.2,29.8 26.2,9.9 4.6,9.9
  pour GND (isolate 0.05, rank 3, no thermals): 4.8,29.6 26.4,29.6 26.4,9.7 4.8,9.7
  pour Bottom (isolate 0.05, rank 3): 4.9,29.5 26.5,29.5 26.5,9.6 4.9,9.6
  pour PWR (isolate 0.05, rank 3, no thermals): 4.7,29.7 26.3,29.7 26.3,9.8 4.7,9.8
AGND7  (via drill 0.2 pad 0.25)
  Bottom 0.127: J3.M4 J3.70
  Bottom 0.2: v36.98,12.45 37.34,12.45 U3.M17
  other vias: 49.66,23.81 45.79,23.7 44.75,23.45 44.13,24.22 46.28,12.25 39.19,25.97 44.96,26.5 47.19,13.02 47.69,13.46 38.54,21.62 38.25,21.25 38.84,21.21 48.22,20.45 33.71,15.16 32.58,18.1 34.62,16.85 33.15,18.53 49.27,15.47 50.16,17.83 49.45,16.66 49.44,17.96 48.18,24.07 44.43,25.81 39.08,28.56 32.73,21.75 50.19,21.84 46.62,13.44 42.83,11.63 37.69,25.97 48.82,20.25 40.2,13.58 41.9,14.18 38.99,13.71 41.1,10.88 34.94,13.57 39.82,15.94 34.99,25.56
  pour Top (isolate 0.05, rank 3): 30,29.8 51.6,29.8 51.6,9.9 30,9.9
  pour GND (isolate 0.05, rank 3, no thermals): 30.2,29.6 51.8,29.6 51.8,9.7 30.2,9.7
  pour Bottom (isolate 0.05, rank 3): 30.3,29.5 51.9,29.5 51.9,9.6 30.3,9.6
  pour PWR (isolate 0.05, rank 3, no thermals): 30.1,29.7 51.7,29.7 51.7,9.8 30.1,9.8
AGND8  (via drill 0.2 pad 0.25)
  Bottom 0.127: J5.M4 J5.70
  Bottom 0.2: v62.38,12.45 62.74,12.45 U5.M17
  other vias: 75.06,23.81 71.19,23.7 70.15,23.45 69.53,24.22 71.68,12.25 64.59,25.97 70.36,26.5 72.59,13.02 73.09,13.46 63.94,21.62 63.65,21.25 64.24,21.21 73.62,20.45 59.11,15.16 57.98,18.1 60.02,16.85 58.55,18.53 74.67,15.47 75.56,17.83 74.85,16.66 74.84,17.96 73.58,24.07 69.83,25.81 64.48,28.56 58.13,21.75 75.59,21.84 72.02,13.44 68.23,11.63 63.09,25.97 74.22,20.25 65.6,13.58 67.3,14.18 64.39,13.71 66.5,10.88 60.34,13.57 65.22,15.94 60.39,25.56
  pour Top (isolate 0.05, rank 3): 55.4,29.8 77,29.8 77,9.9 55.4,9.9
  pour GND (isolate 0.05, rank 3, no thermals): 55.6,29.6 77.2,29.6 77.2,9.7 55.6,9.7
  pour Bottom (isolate 0.05, rank 3): 55.7,29.5 77.3,29.5 77.3,9.6 55.7,9.6
  pour PWR (isolate 0.05, rank 3, no thermals): 55.5,29.7 77.1,29.7 77.1,9.8 55.5,9.8
AGND9  (via drill 0.2 pad 0.25)
  Bottom 0.127: J7.M4 J7.70
  Bottom 0.2: v11.58,37.84 11.95,37.84 U7.M17
  other vias: 24.26,49.21 20.39,49.1 19.35,48.85 18.73,49.62 20.88,37.65 13.79,51.37 19.56,51.9 21.79,38.42 22.29,38.86 13.14,47.02 12.85,46.65 13.44,46.61 22.82,45.85 8.31,40.56 7.18,43.5 9.22,42.25 7.75,43.93 23.87,40.87 24.76,43.23 24.05,42.06 24.04,43.36 22.78,49.47 19.03,51.21 13.68,53.96 7.33,47.15 24.79,47.24 21.22,38.84 17.43,37.03 12.29,51.37 23.42,45.65 14.8,38.98 16.5,39.58 13.59,39.11 15.7,36.28 9.54,38.97 14.42,41.34 9.59,50.96
  pour Top (isolate 0.05, rank 3): 4.6,55.2 26.2,55.2 26.2,35.3 4.6,35.3
  pour GND (isolate 0.05, rank 3, no thermals): 4.8,55 26.4,55 26.4,35.1 4.8,35.1
  pour Bottom (isolate 0.05, rank 3): 4.9,54.9 26.5,54.9 26.5,35 4.9,35
  pour PWR (isolate 0.05, rank 3, no thermals): 4.7,55.1 26.3,55.1 26.3,35.2 4.7,35.2
AGND10  (via drill 0.2 pad 0.25)
  Bottom 0.127: J9.M4 J9.70
  Bottom 0.2: v36.98,37.84 37.34,37.84 U9.M17
  other vias: 49.66,49.21 45.79,49.1 44.75,48.85 44.13,49.62 46.28,37.65 39.19,51.37 44.96,51.9 47.19,38.42 47.69,38.86 38.54,47.02 38.25,46.65 38.84,46.61 48.22,45.85 33.71,40.56 32.58,43.5 34.62,42.25 33.15,43.93 49.27,40.87 50.16,43.23 49.45,42.06 49.44,43.36 48.18,49.47 44.43,51.21 39.08,53.96 32.73,47.15 50.19,47.24 46.62,38.84 42.83,37.03 37.69,51.37 48.82,45.65 40.2,38.98 41.9,39.58 38.99,39.11 41.1,36.28 34.94,38.97 39.82,41.34 34.99,50.96
  pour Top (isolate 0.05, rank 3): 30,55.2 51.6,55.2 51.6,35.3 30,35.3
  pour GND (isolate 0.05, rank 3, no thermals): 30.2,55 51.8,55 51.8,35.1 30.2,35.1
  pour Bottom (isolate 0.05, rank 3): 30.3,54.9 51.9,54.9 51.9,35 30.3,35
  pour PWR (isolate 0.05, rank 3, no thermals): 30.1,55.1 51.7,55.1 51.7,35.2 30.1,35.2
AGND11  (via drill 0.2 pad 0.25)
  Bottom 0.127: J11.M4 J11.70
  Bottom 0.2: v62.38,37.84 62.74,37.84 U11.M17